# Altium PCB acqboard.PcbDoc (part 1 of 5)
Units mil, origin at the board's own origin, x right, y up, seen from the top; angles counter-clockwise.
Board outline 7000 x 5250 mil, 4 copper layers (Top Layer, Internal Plane 1, Internal Plane 2, Bottom Layer); 629 components, 384 nets, 2086 pads, 785 vias.
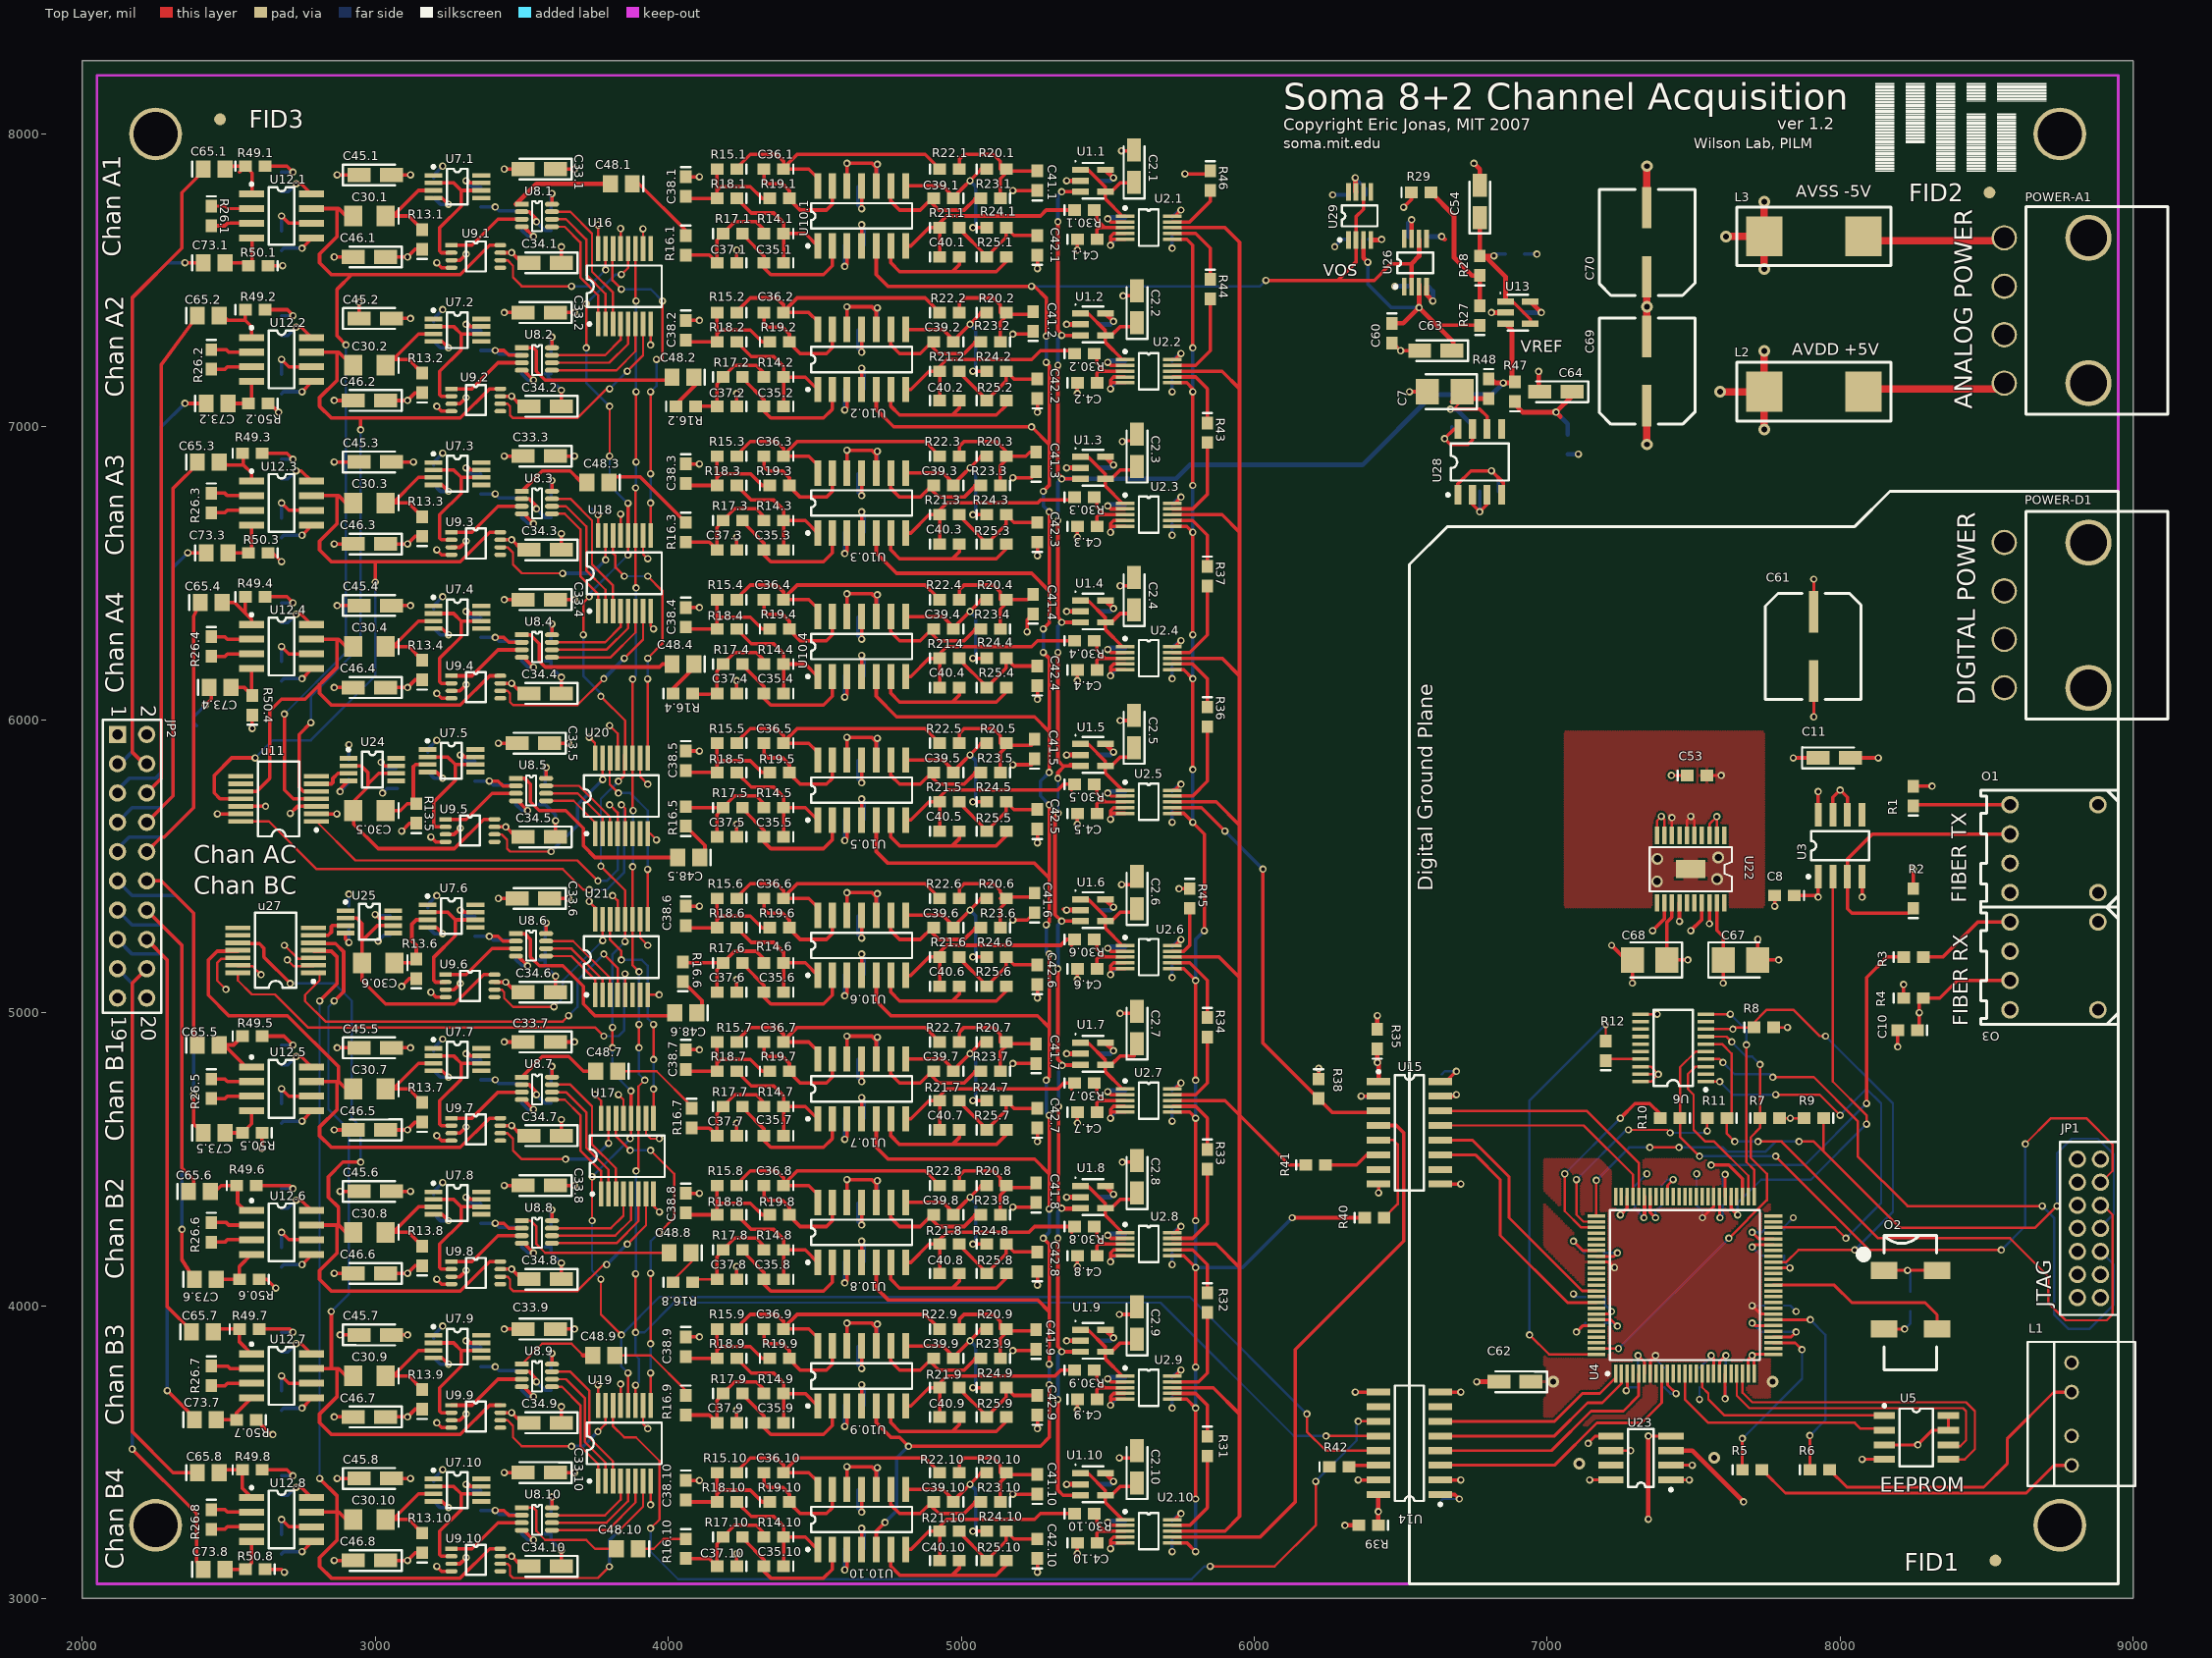
[diagram p0: Top Layer view]
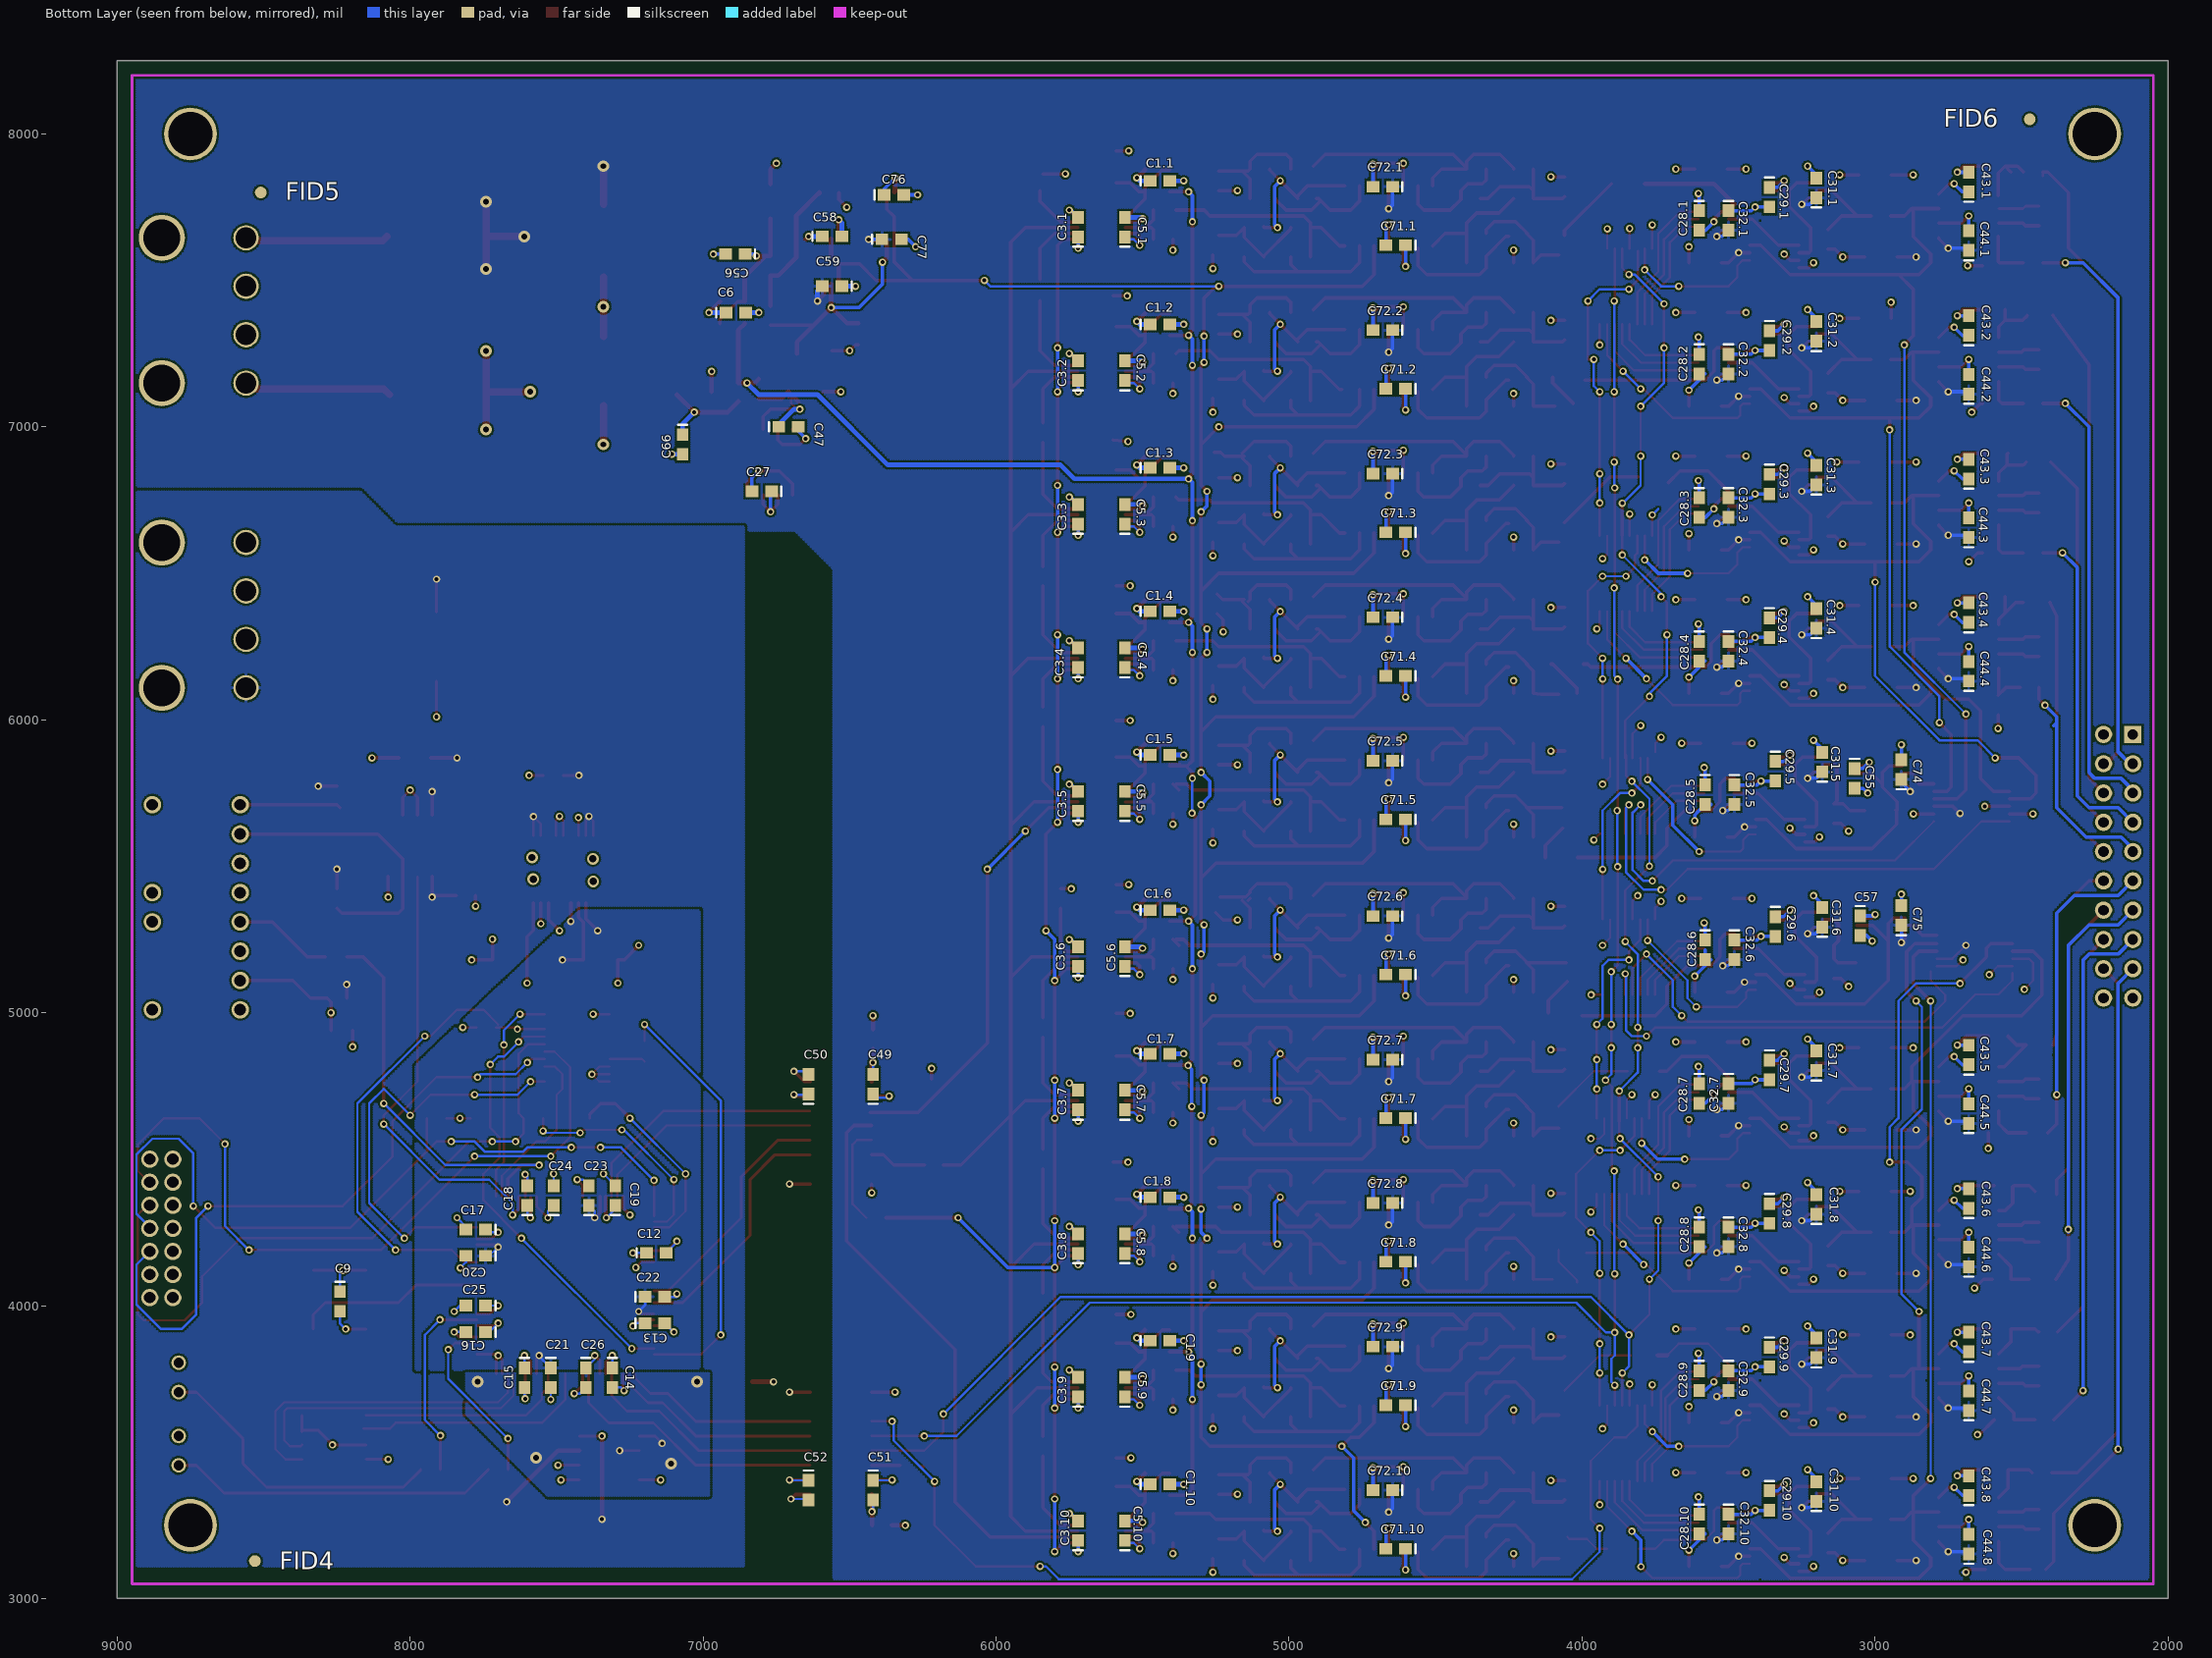
[diagram p1: Bottom Layer view, seen from below]
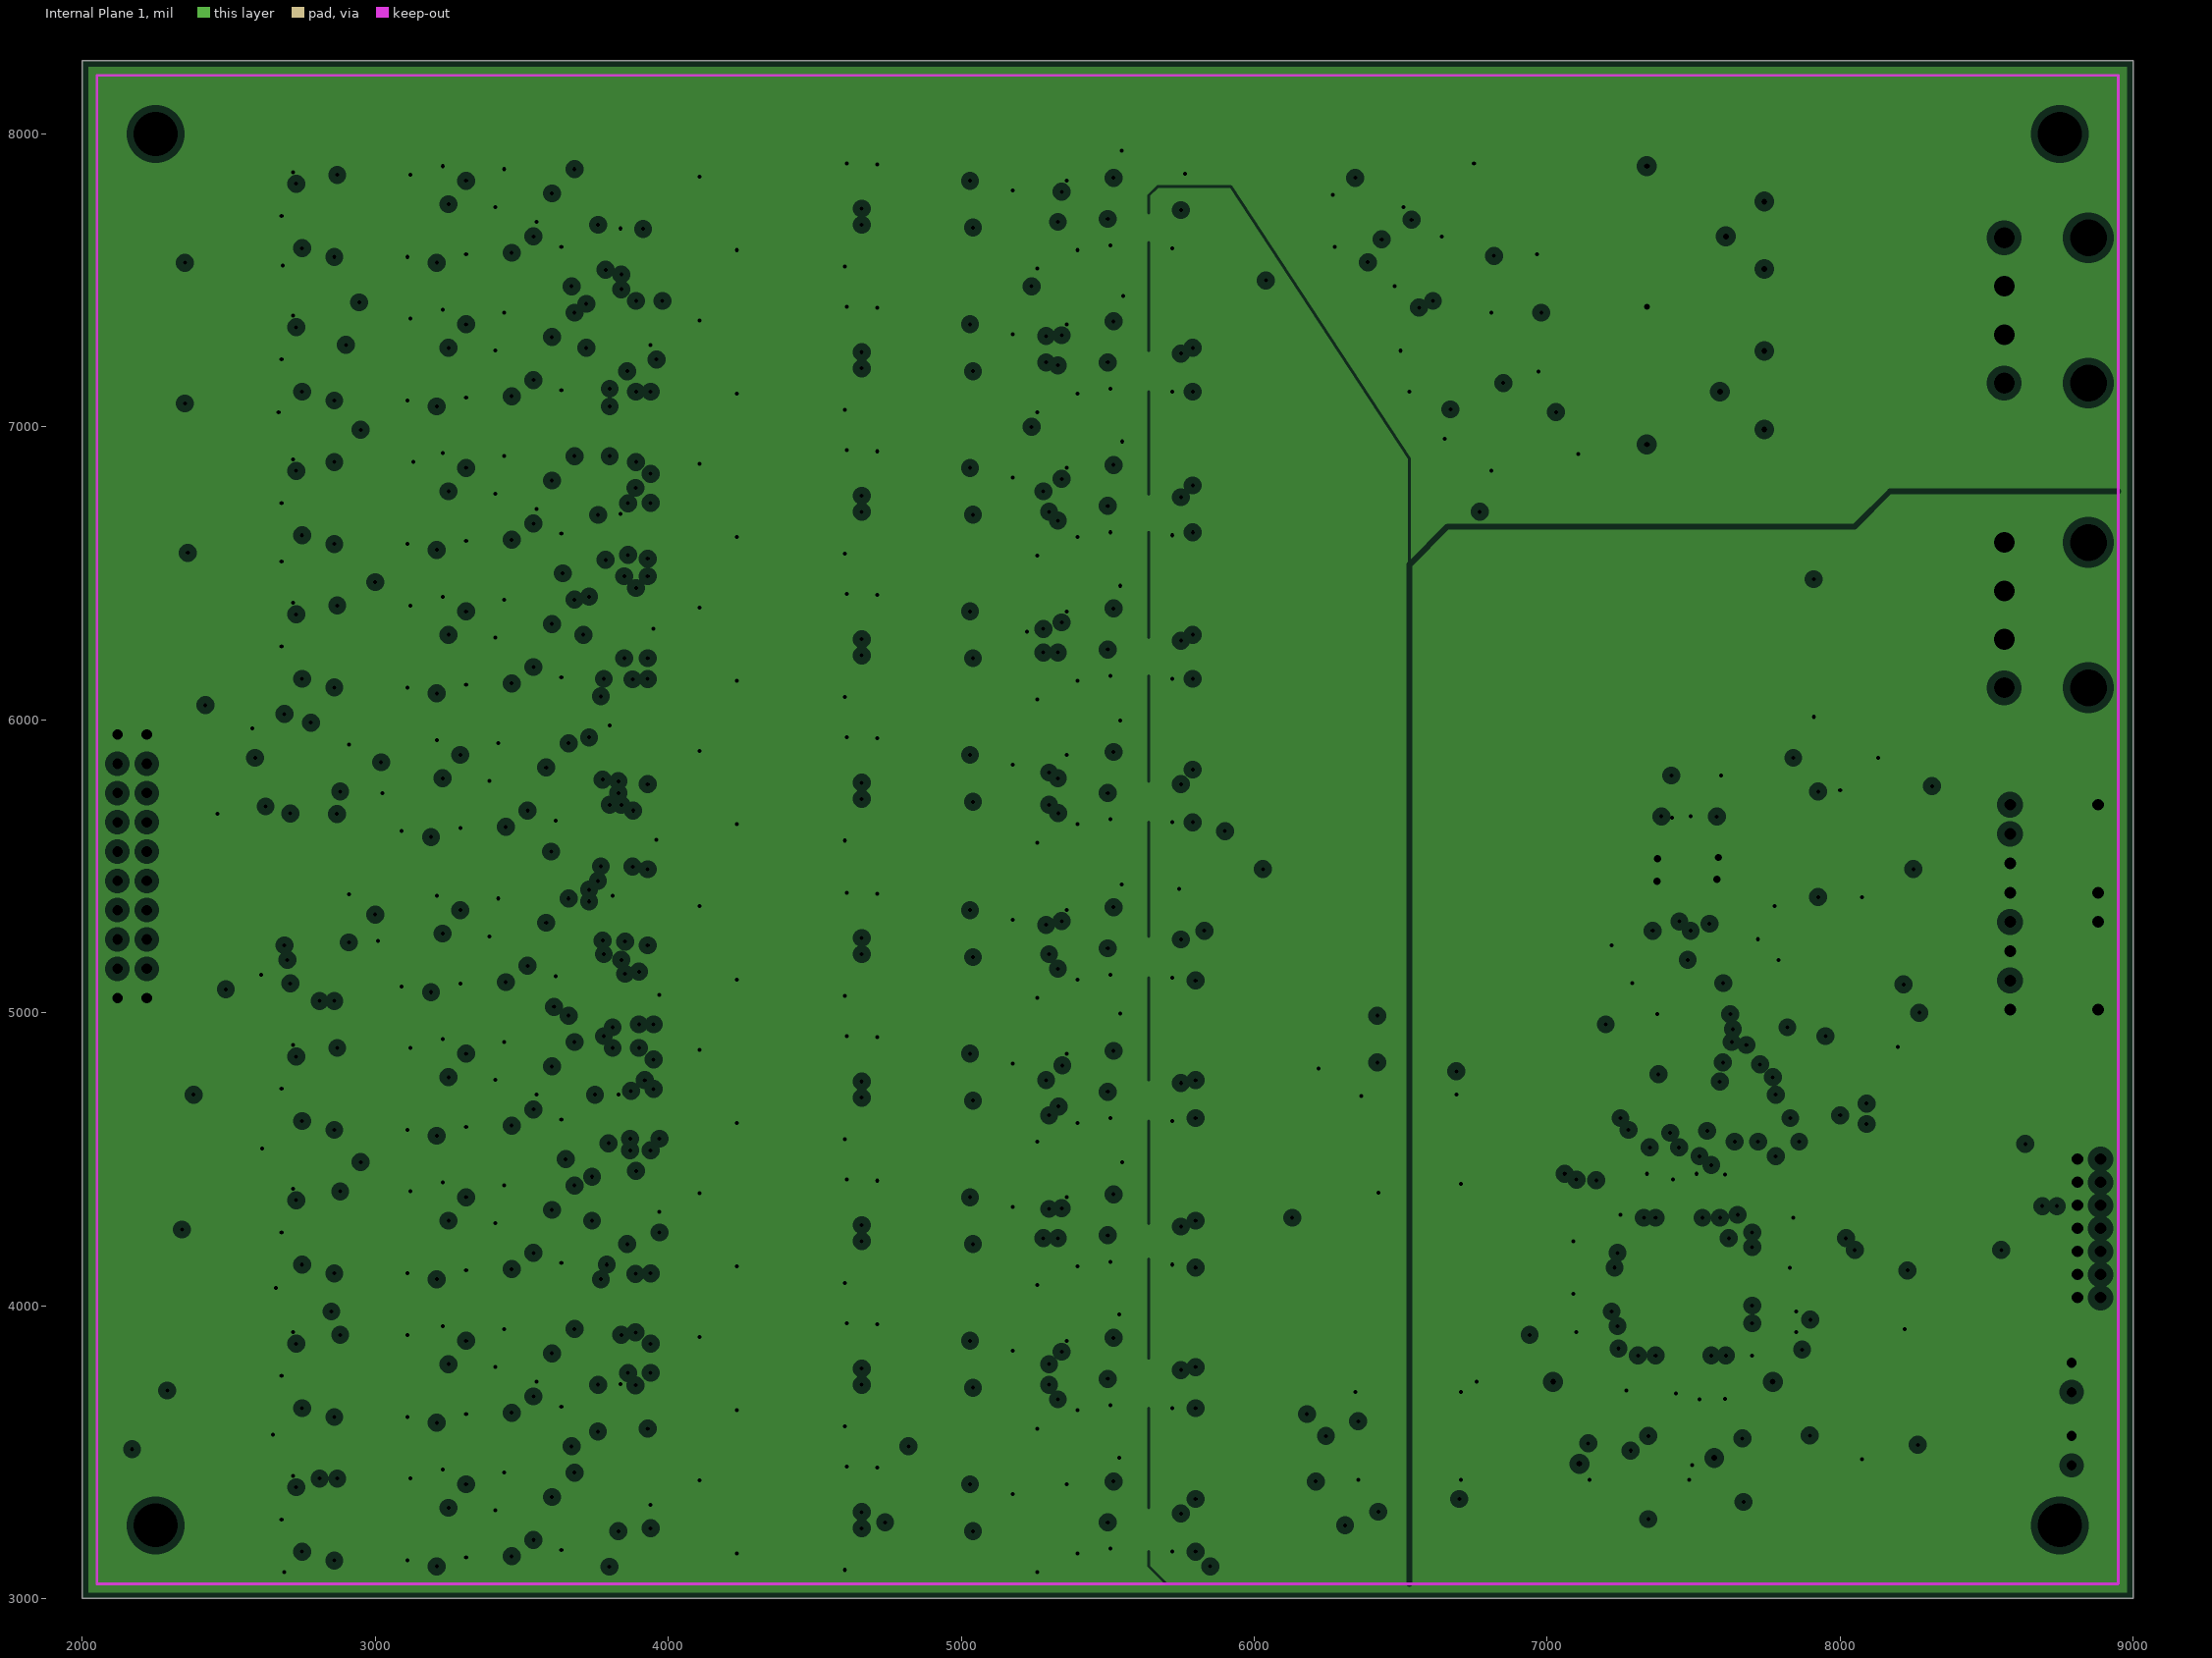
[diagram p2: Internal Plane 1, clearances drawn from the general rule]
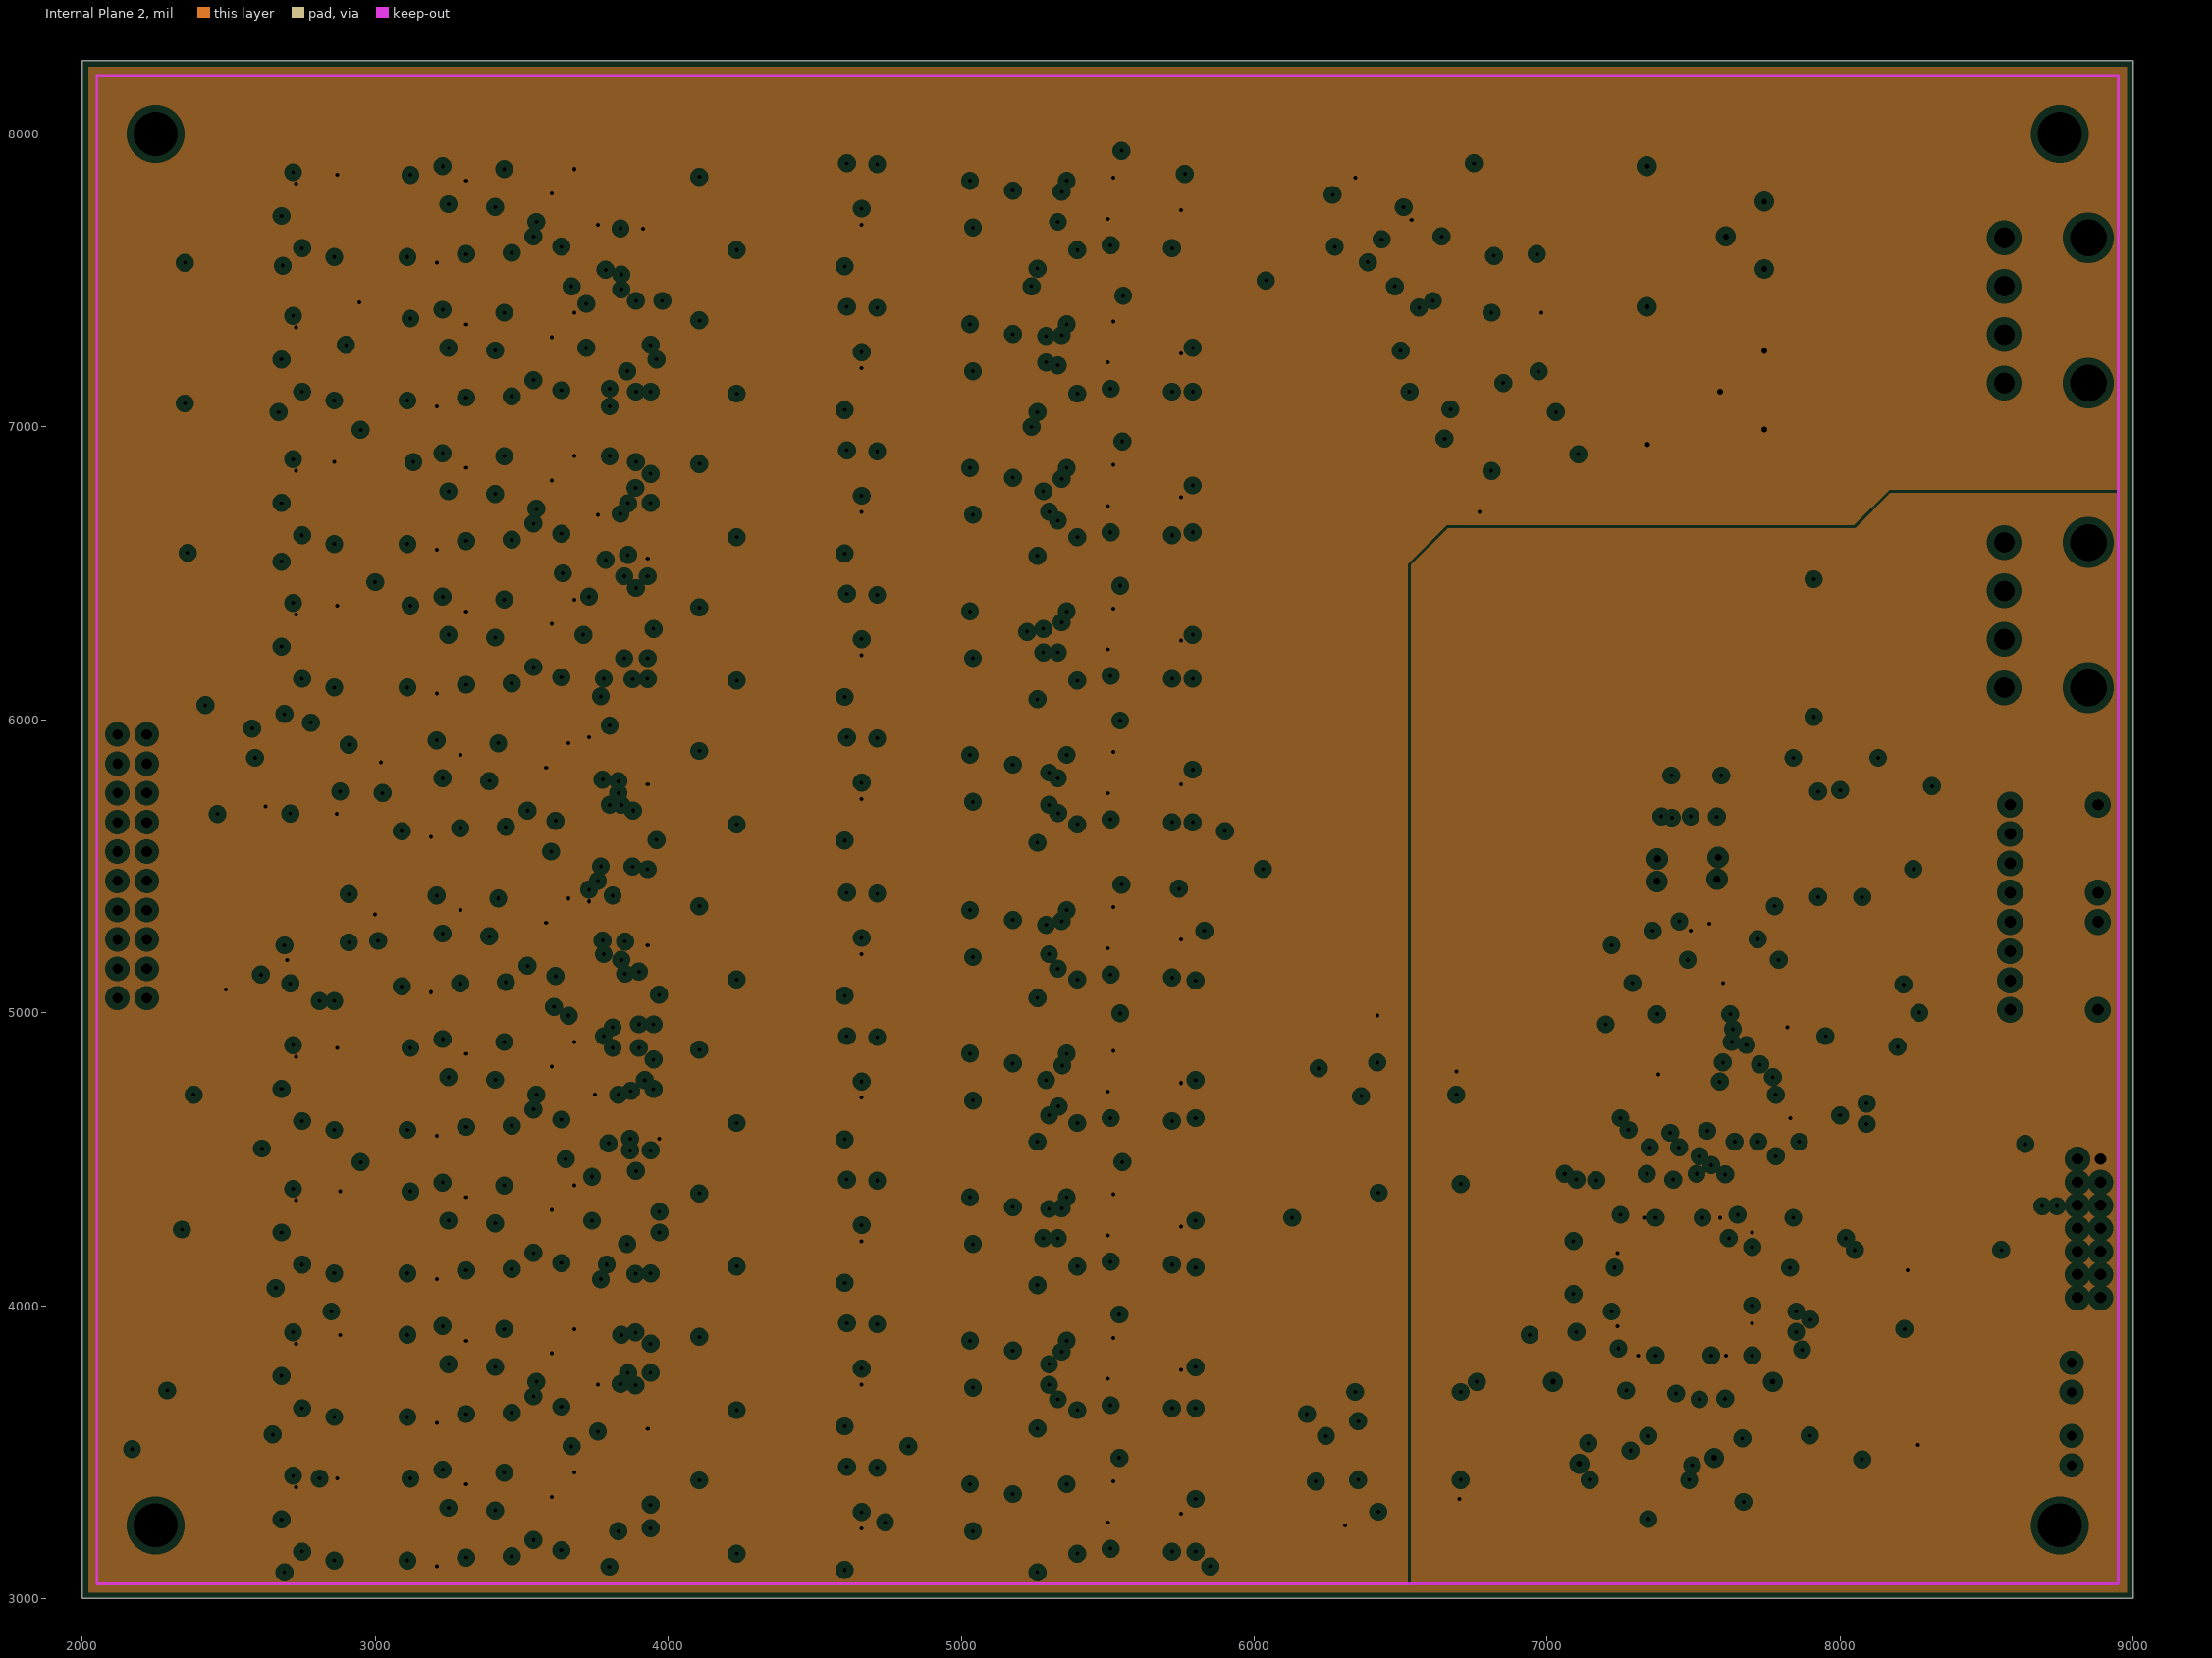
[diagram p3: Internal Plane 2, clearances drawn from the general rule]

## Layer stack, top to bottom
Top Layer: signal copper 1.4
Dielectric: core 12.6, FR-4, Dk 4.8
Internal Plane 1: plane copper 1.4, net (Multiple Nets)
Dielectric: prepreg 12.6, FR-4, Dk 4.8
Internal Plane 2: plane copper 1.4, net (Multiple Nets)
Dielectric: core 12.6, FR-4, Dk 4.8
Bottom Layer: signal copper 1.4

## Board outline
2000,3000 9000,3000 9000,8250 2000,8250

## Design rules (kind name [scope] priority, off if disabled: settings)
Clearance [All] p1: gap=7
ComponentClearance [All] p1: gap=10 collisioncheckmode=0 verticalgap=10
HoleSize [All] p1: absolutevalues=TRUE maxlimit=200 minlimit=1 maxpercent=80.000 minpercent=20.000
PlaneClearance [All] p1: clearance=24
PlaneConnect [All] p1: planeconnectstyle=Relief reliefexpansion=20 reliefentries=4 reliefconductorwidth=20 reliefairgap=10
PolygonConnect PolyConnPower [(InComponent('U22') AND InNet('GND'))] p1: connectstyle=Relief reliefconductorwidth=50 reliefentries=4 polygonreliefangle="90 Angle"
PolygonConnect [All] p2: connectstyle=Relief reliefconductorwidth=10 reliefentries=4 polygonreliefangle="90 Angle"
RoomDefinition ADC3 [InComponentClass('ADC3')] p1: confinementstyle=ConfineIn formatcopy=TRUE lockcomponents=FALSE outline 5350,6530 5840,6530 5840,6970 5350,6970
RoomDefinition ADC1 [InComponentClass('ADC1')] p2: confinementstyle=ConfineIn formatcopy=TRUE lockcomponents=FALSE outline 5350,7510 5840,7510 5840,7950 5350,7950
RoomDefinition ADC2 [InComponentClass('ADC2')] p3: confinementstyle=ConfineIn formatcopy=TRUE lockcomponents=FALSE outline 5350,7020 5840,7020 5840,7460 5350,7460
RoomDefinition ADC4 [InComponentClass('ADC4')] p4: confinementstyle=ConfineIn formatcopy=TRUE lockcomponents=FALSE outline 5350,6040 5840,6040 5840,6480 5350,6480
RoomDefinition ADC5 [InComponentClass('ADC5')] p5: confinementstyle=ConfineIn formatcopy=TRUE lockcomponents=FALSE outline 5350,5550 5840,5550 5840,5990 5350,5990
RoomDefinition ADC6 [InComponentClass('ADC6')] p6: confinementstyle=ConfineIn formatcopy=TRUE lockcomponents=FALSE outline 5350,5020 5840,5020 5840,5460 5350,5460
RoomDefinition ADC7 [InComponentClass('ADC7')] p7: confinementstyle=ConfineIn formatcopy=TRUE lockcomponents=FALSE outline 5350,4530 5840,4530 5840,4970 5350,4970
RoomDefinition ADC8 [InComponentClass('ADC8')] p8: confinementstyle=ConfineIn formatcopy=TRUE lockcomponents=FALSE outline 5350,4040 5840,4040 5840,4480 5350,4480
RoomDefinition ADC9 [InComponentClass('ADC9')] p9: confinementstyle=ConfineIn formatcopy=TRUE lockcomponents=FALSE outline 5350,3550 5840,3550 5840,3990 5350,3990
RoomDefinition ADC10 [InComponentClass('ADC10')] p10: confinementstyle=ConfineIn formatcopy=TRUE lockcomponents=FALSE outline 5350,3060 5840,3060 5840,3500 5350,3500
RoomDefinition inmux1 [InComponentClass('inmux1')] p11: confinementstyle=ConfineIn formatcopy=TRUE lockcomponents=FALSE outline 2420,4980 3000,4980 3000,5950 2420,5950
RoomDefinition AA6 [InComponentClass('AA6')] p12: confinementstyle=ConfineIn formatcopy=TRUE lockcomponents=FALSE outline 3990,5010 5340,5010 5340,5460 3990,5460
RoomDefinition PGA8 [InComponentClass('PGA8')] p13: confinementstyle=ConfineIn formatcopy=TRUE lockcomponents=FALSE outline 2860,4030 3710,4030 3710,4480 2860,4480
RoomDefinition IN8 [InComponentClass('IN8')] p14: confinementstyle=ConfineIn formatcopy=TRUE lockcomponents=FALSE outline 2380,3050 3110,3050 3110,3500 2380,3500
RoomDefinition IN6 [InComponentClass('IN6')] p15: confinementstyle=ConfineIn formatcopy=TRUE lockcomponents=FALSE outline 2380,4030 3110,4030 3110,4480 2380,4480
RoomDefinition IN7 [InComponentClass('IN7')] p16: confinementstyle=ConfineIn formatcopy=TRUE lockcomponents=FALSE outline 2380,3540 3110,3540 3110,3990 2380,3990
RoomDefinition IN5 [InComponentClass('IN5')] p17: confinementstyle=ConfineIn formatcopy=TRUE lockcomponents=FALSE outline 2380,4520 3110,4520 3110,4970 2380,4970
RoomDefinition AA4 [InComponentClass('AA4')] p18: confinementstyle=ConfineIn formatcopy=TRUE lockcomponents=FALSE outline 3990,6030 5340,6030 5340,6480 3990,6480
RoomDefinition AA3 [InComponentClass('AA3')] p19: confinementstyle=ConfineIn formatcopy=TRUE lockcomponents=FALSE outline 3990,6520 5340,6520 5340,6970 3990,6970
RoomDefinition PGA4 [InComponentClass('PGA4')] p20: confinementstyle=ConfineIn formatcopy=TRUE lockcomponents=FALSE outline 2860,6030 3710,6030 3710,6480 2860,6480
RoomDefinition IN4 [InComponentClass('IN4')] p21: confinementstyle=ConfineIn formatcopy=TRUE lockcomponents=FALSE outline 2380,6030 3110,6030 3110,6480 2380,6480
RoomDefinition PGA3 [InComponentClass('PGA3')] p22: confinementstyle=ConfineIn formatcopy=TRUE lockcomponents=FALSE outline 2860,6520 3710,6520 3710,6970 2860,6970
RoomDefinition IN3 [InComponentClass('IN3')] p23: confinementstyle=ConfineIn formatcopy=TRUE lockcomponents=FALSE outline 2380,6520 3110,6520 3110,6970 2380,6970
RoomDefinition AA2 [InComponentClass('AA2')] p24: confinementstyle=ConfineIn formatcopy=TRUE lockcomponents=FALSE outline 3990,7010 5340,7010 5340,7460 3990,7460
RoomDefinition PGA2 [InComponentClass('PGA2')] p25: confinementstyle=ConfineIn formatcopy=TRUE lockcomponents=FALSE outline 2860,7010 3710,7010 3710,7460 2860,7460
RoomDefinition IN2 [InComponentClass('IN2')] p26: confinementstyle=ConfineIn formatcopy=TRUE lockcomponents=FALSE outline 2380,7010 3110,7010 3110,7460 2380,7460
RoomDefinition AA1 [InComponentClass('AA1')] p27: confinementstyle=ConfineIn formatcopy=TRUE lockcomponents=FALSE outline 3990,7500 5340,7500 5340,7950 3990,7950
RoomDefinition AA5 [InComponentClass('AA5')] p28: confinementstyle=ConfineIn formatcopy=TRUE lockcomponents=FALSE outline 3990,5540 5340,5540 5340,5990 3990,5990
RoomDefinition AA7 [InComponentClass('AA7')] p29: confinementstyle=ConfineIn formatcopy=TRUE lockcomponents=FALSE outline 3990,4520 5340,4520 5340,4970 3990,4970
RoomDefinition AA8 [InComponentClass('AA8')] p30: confinementstyle=ConfineIn formatcopy=TRUE lockcomponents=FALSE outline 3990,4030 5340,4030 5340,4480 3990,4480
RoomDefinition AA9 [InComponentClass('AA9')] p31: confinementstyle=ConfineIn formatcopy=TRUE lockcomponents=FALSE outline 3990,3540 5340,3540 5340,3990 3990,3990
RoomDefinition AA10 [InComponentClass('AA10')] p32: confinementstyle=ConfineIn formatcopy=TRUE lockcomponents=FALSE outline 3990,3050 5340,3050 5340,3500 3990,3500
RoomDefinition "FPGA Power" [InComponentClass('FPGA Power')] p33: confinementstyle=ConfineIn formatcopy=TRUE lockcomponents=FALSE outline 9000,3850 6880,3850 6880,4570 9000,4570
RoomDefinition FPGA [InComponentClass('FPGA')] p34: confinementstyle=ConfineIn formatcopy=TRUE lockcomponents=FALSE outline 9000,3110 6880,3110 6880,3910 9000,3910
RoomDefinition IN1 [InComponentClass('IN1')] p35: confinementstyle=ConfineIn formatcopy=TRUE lockcomponents=FALSE outline 2380,7500 3110,7500 3110,7950 2380,7950
RoomDefinition PGA1 [InComponentClass('PGA1')] p36: confinementstyle=ConfineIn formatcopy=TRUE lockcomponents=FALSE outline 2860,7500 3710,7500 3710,7950 2860,7950
RoomDefinition PGA5 [InComponentClass('PGA5')] p37: confinementstyle=ConfineIn formatcopy=TRUE lockcomponents=FALSE outline 2840,5540 3690,5540 3690,5990 2840,5990
RoomDefinition PGA6 [InComponentClass('PGA6')] p38: confinementstyle=ConfineIn formatcopy=TRUE lockcomponents=FALSE outline 2840,5010 3690,5010 3690,5460 2840,5460
RoomDefinition PGA7 [InComponentClass('PGA7')] p39: confinementstyle=ConfineIn formatcopy=TRUE lockcomponents=FALSE outline 2860,4520 3710,4520 3710,4970 2860,4970
RoomDefinition PGA9 [InComponentClass('PGA9')] p40: confinementstyle=ConfineIn formatcopy=TRUE lockcomponents=FALSE outline 2860,3540 3710,3540 3710,3990 2860,3990
RoomDefinition PGA10 [InComponentClass('PGA10')] p41: confinementstyle=ConfineIn formatcopy=TRUE lockcomponents=FALSE outline 2860,3050 3710,3050 3710,3500 2860,3500
RoomDefinition isolation [InComponentClass('isolation')] p42: confinementstyle=ConfineIn formatcopy=TRUE lockcomponents=FALSE outline 9000,4520 6860,4520 6860,5060 9000,5060
RoomDefinition main [InComponentClass('main')] p43: confinementstyle=ConfineIn formatcopy=TRUE lockcomponents=FALSE outline 9000,5010 8620,5010 8620,6290 9000,6290
RoomDefinition muxes [InComponentClass('muxes')] p44: confinementstyle=ConfineIn formatcopy=TRUE lockcomponents=FALSE outline 9000,6230 7290,6230 7290,6700 9000,6700
RoomDefinition power [InComponentClass('power')] p45: confinementstyle=ConfineIn formatcopy=TRUE lockcomponents=FALSE outline 6530,5760 8950,5760 8950,7950 6530,7950
RoutingVias [All] p1: holewidth=13.5 width=25 viastyle="Through Hole" minholewidth=13.5 minwidth=25 maxholewidth=28 maxwidth=50
SolderMaskExpansion [All] p1: expansion=4
TestPointUsage [All] p1: valid=0 allowmultiple=FALSE
Testpoint [All] p1: side=15 testpointundercomponent=TRUE minsize=40 maxsize=100 preferedsize=60 minholesize=0 maxholesize=40 preferedholesize=32 testpointgrid=1 style=1023 order=0123456789
Width [All] p1: maxlimit=100 minlimit=7 preferedwidth=7 toplayer_prefwidth=16 bottomlayer_prefwidth=12 minimp=50.000000 maximp=50.000000 favimp=50.000000
14 further rules are at their usual default settings.

## Classes and differential pairs
net class H[0..9]: H0 H1 H2 H3 H4 H5 H6 H7 H8 H9
net class GC[0..10]: GC1 GC2 GC3 GC4 GC5 GC6 GC7 GC8 GC9 GC10
net class GB[0..10]: GB1 GB2 GB3 GB4 GB5 GB6 GB7 GB8 GB9 GB10
net class GA[0..10]: GA1 GA2 GA3 GA4 GA5 GA6 GA7 GA8 GA9 GA10
component class inmux1: C55 C57 C74 C75 u11 U24 U25 u27
component class AA1: C35.1 C36.1 C37.1 C38.1 C39.1 C40.1 C41.1 C42.1 C71.1 C72.1 R14.1 R15.1 R16.1 R17.1 R18.1 R19.1 R20.1 R21.1 R22.1 R23.1 R24.1 R25.1 U10.1
component class AA2: C35.2 C36.2 C37.2 C38.2 C39.2 C40.2 C41.2 C42.2 C71.2 C72.2 R14.2 R15.2 R16.2 R17.2 R18.2 R19.2 R20.2 R21.2 R22.2 R23.2 R24.2 R25.2 U10.2
component class AA3: C35.3 C36.3 C37.3 C38.3 C39.3 C40.3 C41.3 C42.3 C71.3 C72.3 R14.3 R15.3 R16.3 R17.3 R18.3 R19.3 R20.3 R21.3 R22.3 R23.3 R24.3 R25.3 U10.3
component class AA4: C35.4 C36.4 C37.4 C38.4 C39.4 C40.4 C41.4 C42.4 C71.4 C72.4 R14.4 R15.4 R16.4 R17.4 R18.4 R19.4 R20.4 R21.4 R22.4 R23.4 R24.4 R25.4 U10.4
component class AA5: C35.5 C36.5 C37.5 C38.5 C39.5 C40.5 C41.5 C42.5 C71.5 C72.5 R14.5 R15.5 R16.5 R17.5 R18.5 R19.5 R20.5 R21.5 R22.5 R23.5 R24.5 R25.5 U10.5
component class AA6: C35.6 C36.6 C37.6 C38.6 C39.6 C40.6 C41.6 C42.6 C71.6 C72.6 R14.6 R15.6 R16.6 R17.6 R18.6 R19.6 R20.6 R21.6 R22.6 R23.6 R24.6 R25.6 U10.6
component class AA7: C35.7 C36.7 C37.7 C38.7 C39.7 C40.7 C41.7 C42.7 C71.7 C72.7 R14.7 R15.7 R16.7 R17.7 R18.7 R19.7 R20.7 R21.7 R22.7 R23.7 R24.7 R25.7 U10.7
component class AA8: C35.8 C36.8 C37.8 C38.8 C39.8 C40.8 C41.8 C42.8 C71.8 C72.8 R14.8 R15.8 R16.8 R17.8 R18.8 R19.8 R20.8 R21.8 R22.8 R23.8 R24.8 R25.8 U10.8
component class AA9: C35.9 C36.9 C37.9 C38.9 C39.9 C40.9 C41.9 C42.9 C71.9 C72.9 R14.9 R15.9 R16.9 R17.9 R18.9 R19.9 R20.9 R21.9 R22.9 R23.9 R24.9 R25.9 U10.9
component class AA10: C35.10 C36.10 C37.10 C38.10 C39.10 C40.10 C41.10 C42.10 C71.10 C72.10 R14.10 R15.10 R16.10 R17.10 R18.10 R19.10 R20.10 R21.10 R22.10 R23.10 R24.10 R25.10 U10.10
component class "FPGA Power": C12 C13 C14 C15 C16 C17 C18 C19 C20 C21 C22 C23 C24 C25 C26 JP1 R7 R8 R9 R10 R11 R12 U6
component class FPGA: C8 C9 C10 C11 L1 O1 O2 O3 R1 R2 R3 R4 R5 R6 U3 U4 U5
component class IN1: C43.1 C44.1 C45.1 C46.1 C65.1 C73.1 R26.1 R49.1 R50.1 U12.1
component class IN2: C43.2 C44.2 C45.2 C46.2 C65.2 C73.2 R26.2 R49.2 R50.2 U12.2
component class IN3: C43.3 C44.3 C45.3 C46.3 C65.3 C73.3 R26.3 R49.3 R50.3 U12.3
component class IN4: C43.4 C44.4 C45.4 C46.4 C65.4 C73.4 R26.4 R49.4 R50.4 U12.4
component class IN5: C43.5 C44.5 C45.5 C46.5 C65.5 C73.5 R26.5 R49.5 R50.5 U12.5
component class IN6: C43.6 C44.6 C45.6 C46.6 C65.6 C73.6 R26.6 R49.6 R50.6 U12.6
component class IN7: C43.7 C44.7 C45.7 C46.7 C65.7 C73.7 R26.7 R49.7 R50.7 U12.7
component class IN8: C43.8 C44.8 C45.8 C46.8 C65.8 C73.8 R26.8 R49.8 R50.8 U12.8
component class PGA1: C28.1 C29.1 C30.1 C31.1 C32.1 C33.1 C34.1 C48.1 R13.1 U7.1 U8.1 U9.1
component class PGA2: C28.2 C29.2 C30.2 C31.2 C32.2 C33.2 C34.2 C48.2 R13.2 U7.2 U8.2 U9.2
component class PGA3: C28.3 C29.3 C30.3 C31.3 C32.3 C33.3 C34.3 C48.3 R13.3 U7.3 U8.3 U9.3
component class PGA4: C28.4 C29.4 C30.4 C31.4 C32.4 C33.4 C34.4 C48.4 R13.4 U7.4 U8.4 U9.4
component class PGA5: C28.5 C29.5 C30.5 C31.5 C32.5 C33.5 C34.5 C48.5 R13.5 U7.5 U8.5 U9.5
component class PGA6: C28.6 C29.6 C30.6 C31.6 C32.6 C33.6 C34.6 C48.6 R13.6 U7.6 U8.6 U9.6
component class PGA7: C28.7 C29.7 C30.7 C31.7 C32.7 C33.7 C34.7 C48.7 R13.7 U7.7 U8.7 U9.7
component class PGA8: C28.8 C29.8 C30.8 C31.8 C32.8 C33.8 C34.8 C48.8 R13.8 U7.8 U8.8 U9.8
component class PGA9: C28.9 C29.9 C30.9 C31.9 C32.9 C33.9 C34.9 C48.9 R13.9 U7.9 U8.9 U9.9
component class PGA10: C28.10 C29.10 C30.10 C31.10 C32.10 C33.10 C34.10 C48.10 R13.10 U7.10 U8.10 U9.10
component class isolation: C48 C49 C50 C51 C52 R35 R38 R39 R40 R41 R42 U14 U15
component class muxes: U16 U17 U18 U19 U20 U21
component class power: C6 C7 C27 C47 C53 C54 C56 C58 C59 C60 C61 C62 C63 C64 C66 C67 C68 C69 C70 C76 C77 L2 L3 POWER-A1 POWER-D1 R27 R28 R29 R47 R48 U13 U22 U23 U26 U28 U29
net class AAIN[1..10]: AAIN1 AAIN2 AAIN3 AAIN4 AAIN5 AAIN6 AAIN7 AAIN8 AAIN9 AAIN10
net class AAOUT[1..10]: AAOUT1 AAOUT2 AAOUT3 AAOUT4 AAOUT5 AAOUT6 AAOUT7 AAOUT8 AAOUT9 AAOUT10
net class IN+[1..8]: IN+1 IN+2 IN+3 IN+4 IN+5 IN+6 IN+7 IN+8
net class IN-[1..8]: IN-1 IN-2 IN-3 IN-4 IN-5 IN-6 IN-7 IN-8
net class INAOUT[1..8]: INAOUT1 INAOUT2 INAOUT3 INAOUT4 INAOUT5 INAOUT6 INAOUT7 INAOUT8
net class PGAIN[1..10]: PGAIN5 PGAIN6
channel class PGA: PGA1 PGA2 PGA3 PGA4 PGA5 PGA6 PGA7 PGA8 PGA9 PGA10
channel class aafilter: AA1 AA2 AA3 AA4 AA5 AA6 AA7 AA8 AA9 AA10
channel class input: IN1 IN2 IN3 IN4 IN5 IN6 IN7 IN8
component class ADC1: C1.1 C2.1 C3.1 C4.1 C5.1 R30.1 U1.1 U2.1
component class ADC2: C1.2 C2.2 C3.2 C4.2 C5.2 R30.2 U1.2 U2.2
component class ADC3: C1.3 C2.3 C3.3 C4.3 C5.3 R30.3 U1.3 U2.3
component class ADC4: C1.4 C2.4 C3.4 C4.4 C5.4 R30.4 U1.4 U2.4
component class ADC5: C1.5 C2.5 C3.5 C4.5 C5.5 R30.5 U1.5 U2.5
component class ADC6: C1.6 C2.6 C3.6 C4.6 C5.6 R30.6 U1.6 U2.6
component class ADC7: C1.7 C2.7 C3.7 C4.7 C5.7 R30.7 U1.7 U2.7
component class ADC8: C1.8 C2.8 C3.8 C4.8 C5.8 R30.8 U1.8 U2.8
component class ADC9: C1.9 C2.9 C3.9 C4.9 C5.9 R30.9 U1.9 U2.9
component class ADC10: C1.10 C2.10 C3.10 C4.10 C5.10 R30.10 U1.10 U2.10
component class main: FID1 FID2 FID3 FID4 FID5 FID6 JP2 R31 R32 R33 R34 R36 R37 R43 R44 R45 R46
net class SDI[1..10]: SDI1 SDI2 SDI3 SDI4 SDI5 SDI6 SDI7 SDI8 SDI9 SDI10
channel class ADC: ADC1 ADC2 ADC3 ADC4 ADC5 ADC6 ADC7 ADC8 ADC9 ADC10
net class SDA[1..10]: SDA1 SDA2 SDA3 SDA4 SDA5 SDA6 SDA7 SDA8 SDA9 SDA10

## Components (designator, comment, footprint, x,y, rotation, side; value= is the part's Value field where it differs from the comment)
C1.1 "CAPACITOR" 0603 5440,7840 r180 bottom (schematic designator C1)
C1.2 "CAPACITOR" 0603 5440,7350 r180 bottom (schematic designator C1)
C1.3 "CAPACITOR" 0603 5440,6860 r180 bottom (schematic designator C1)
C1.4 "CAPACITOR" 0603 5440,6370 r180 bottom (schematic designator C1)
C1.5 "CAPACITOR" 0603 5440,5880 r180 bottom (schematic designator C1)
C1.6 "CAPACITOR" 0603 5440,5350 r180 bottom (schematic designator C1)
C1.7 "CAPACITOR" 0603 5440,4860 r180 bottom (schematic designator C1)
C1.8 "CAPACITOR" 0603 5440,4370 r180 bottom (schematic designator C1)
C1.9 "CAPACITOR" 0603 5440,3880 r180 bottom (schematic designator C1)
C1.10 "CAPACITOR" 0603 5440,3390 r180 bottom (schematic designator C1)
C2.1 "Tantalum" 3216 5590,7890 r90 top (schematic designator C2)
C2.2 "Tantalum" 3216 5600,7410 r90 top (schematic designator C2)
C2.3 "Tantalum" 3216 5600,6920 r90 top (schematic designator C2)
C2.4 "Tantalum" 3216 5590,6430 r90 top (schematic designator C2)
C2.5 "Tantalum" 3216 5590,5960 r90 top (schematic designator C2)
C2.6 "Tantalum" 3216 5600,5410 r90 top (schematic designator C2)
C2.7 "Tantalum" 3216 5600,4950 r90 top (schematic designator C2)
C2.8 "Tantalum" 3216 5600,4440 r90 top (schematic designator C2)
C2.9 "Tantalum" 3216 5600,3940 r90 top (schematic designator C2)
C2.10 "Tantalum" 3216 5600,3450 r90 top (schematic designator C2)
C3.1 "CAPACITOR" 0603 5720,7681.75 r90 bottom (schematic designator C3)
C3.2 "CAPACITOR" 0603 5720,7191.75 r90 bottom (schematic designator C3)
C3.3 "CAPACITOR" 0603 5720,6701.75 r90 bottom (schematic designator C3)
C3.4 "CAPACITOR" 0603 5720,6211.75 r90 bottom (schematic designator C3)
C3.5 "CAPACITOR" 0603 5720,5721.75 r90 bottom (schematic designator C3)
C3.6 "CAPACITOR" 0603 5720,5191.75 r90 bottom (schematic designator C3)
C3.7 "CAPACITOR" 0603 5720,4701.75 r90 bottom (schematic designator C3)
C3.8 "CAPACITOR" 0603 5720,4211.75 r90 bottom (schematic designator C3)
C3.9 "CAPACITOR" 0603 5720,3721.75 r90 bottom (schematic designator C3)
C3.10 "CAPACITOR" 0603 5720,3231.75 r90 bottom (schematic designator C3)
C4.1 "CAPACITOR" 0603 5430,7640 r0 top (schematic designator C4)
C4.2 "CAPACITOR" 0603 5430,7150 r0 top (schematic designator C4)
C4.3 "CAPACITOR" 0603 5430,6660 r0 top (schematic designator C4)
C4.4 "CAPACITOR" 0603 5430,6170 r0 top (schematic designator C4)
C4.5 "CAPACITOR" 0603 5430,5680 r0 top (schematic designator C4)
C4.6 "CAPACITOR" 0603 5430,5150 r0 top (schematic designator C4)
C4.7 "CAPACITOR" 0603 5430,4660 r0 top (schematic designator C4)
C4.8 "CAPACITOR" 0603 5430,4170 r0 top (schematic designator C4)
C4.9 "CAPACITOR" 0603 5430,3680 r0 top (schematic designator C4)
C4.10 "CAPACITOR" 0603 5430,3190 r0 top (schematic designator C4)
C5.1 "CAPACITOR" 0603 5560,7681.75 r90 bottom (schematic designator C5)
C5.2 "CAPACITOR" 0603 5560,7191.75 r90 bottom (schematic designator C5)
C5.3 "CAPACITOR" 0603 5560,6701.75 r90 bottom (schematic designator C5)
C5.4 "CAPACITOR" 0603 5560,6211.75 r90 bottom (schematic designator C5)
C5.5 "CAPACITOR" 0603 5560,5721.75 r90 bottom (schematic designator C5)
C5.6 "CAPACITOR" 0603 5560,5191.75 r90 bottom (schematic designator C5)
C5.7 "CAPACITOR" 0603 5560,4701.75 r90 bottom (schematic designator C5)
C5.8 "CAPACITOR" 0603 5560,4211.75 r90 bottom (schematic designator C5)
C5.9 "CAPACITOR" 0603 5560,3721.75 r90 bottom (schematic designator C5)
C5.10 "CAPACITOR" 0603 5560,3231.75 r90 bottom (schematic designator C5)
C6 "CAPACITOR" 0603 6888.25,7390 r180 bottom
C7 "POLCAP" 3528 6650,7120 r180 top
C8 "CAPACITOR" 0603 7810,5400 r180 top
C9 "CAPACITOR" 0603 8240,4014.31 r270 bottom
C10 "CAPACITOR" 0603 8230,4940 r180 top
C11 "Tantalum" 3216 7980,5870 r0 top
C12 "CAPACITOR" 0603 7160,4180 r180 bottom
C13 "CAPACITOR" 0603 7164.31,3940 r180 bottom
C14 "CAPACITOR" 0603 7310,3754.32 r270 bottom
C15 "CAPACITOR" 0603 7610,3754.31 r270 bottom
C16 "CAPACITOR" 0603 7775.69,3910 r0 bottom
C17 "CAPACITOR" 0603 7775.69,4260 r0 bottom
C18 "CAPACITOR" 0603 7600,4375.69 r90 bottom
C19 "CAPACITOR" 0603 7300,4375.69 r90 bottom
C20 "CAPACITOR" 0603 7775.69,4170 r0 bottom
C21 "CAPACITOR" 0603 7520,3754.31 r270 bottom
C22 "CAPACITOR" 0603 7164.31,4030 r180 bottom
C23 "CAPACITOR" 0603 7390,4375.69 r90 bottom
C24 "CAPACITOR" 0603 7510,4375.69 r90 bottom
C25 "CAPACITOR" 0603 7775.69,4000 r0 bottom
C26 "CAPACITOR" 0603 7400,3754.31 r270 bottom
C27 "CAPACITOR" 0603 6800,6780 r0 bottom
C28.1 "CAPACITOR" 0603 3600,7704.31 r270 bottom (schematic designator C28)
C28.2 "CAPACITOR" 0603 3600,7214.31 r270 bottom (schematic designator C28)
C28.3 "CAPACITOR" 0603 3600,6724.31 r270 bottom (schematic designator C28)
C28.4 "CAPACITOR" 0603 3600,6234.31 r270 bottom (schematic designator C28)
C28.5 "CAPACITOR" 0603 3580,5744.31 r270 bottom (schematic designator C28)
C28.6 "CAPACITOR" 0603 3580,5214.31 r270 bottom (schematic designator C28)
C28.7 "CAPACITOR" 0603 3600,4724.31 r270 bottom (schematic designator C28)
C28.8 "CAPACITOR" 0603 3600,4234.31 r270 bottom (schematic designator C28)
C28.9 "CAPACITOR" 0603 3600,3744.31 r270 bottom (schematic designator C28)
C28.10 "CAPACITOR" 0603 3600,3254.31 r270 bottom (schematic designator C28)
C29.1 "CAPACITOR" 0603 3360,7784.31 r270 bottom (schematic designator C29)
C29.2 "CAPACITOR" 0603 3360,7294.31 r270 bottom (schematic designator C29)
C29.3 "CAPACITOR" 0603 3360,6804.31 r270 bottom (schematic designator C29)
C29.4 "CAPACITOR" 0603 3360,6314.31 r270 bottom (schematic designator C29)
C29.5 "CAPACITOR" 0603 3340,5824.31 r270 bottom (schematic designator C29)
C29.6 "CAPACITOR" 0603 3340,5294.31 r270 bottom (schematic designator C29)
C29.7 "CAPACITOR" 0603 3360,4804.31 r270 bottom (schematic designator C29)
C29.8 "CAPACITOR" 0603 3360,4314.31 r270 bottom (schematic designator C29)
C29.9 "CAPACITOR" 0603 3360,3824.31 r270 bottom (schematic designator C29)
C29.10 "CAPACITOR" 0603 3360,3334.31 r270 bottom (schematic designator C29)
C30.1 "CAPACITOR" 1206 2980,7720 r180 top (schematic designator C30)
C30.2 "CAPACITOR" 1206 2980,7210 r180 top (schematic designator C30)
C30.3 "CAPACITOR" 1206 2980,6740 r180 top (schematic designator C30)
C30.4 "CAPACITOR" 1206 2980,6250 r180 top (schematic designator C30)
C30.5 "CAPACITOR" 1206 2980,5690 r180 top (schematic designator C30)
C30.6 "CAPACITOR" 1206 3010,5170 r180 top (schematic designator C30)
C30.7 "CAPACITOR" 1206 2980,4740 r180 top (schematic designator C30)
C30.8 "CAPACITOR" 1206 2980,4250 r180 top (schematic designator C30)
C30.9 "CAPACITOR" 1206 2980,3760 r180 top (schematic designator C30)
C30.10 "CAPACITOR" 1206 2980,3270 r180 top (schematic designator C30)
C31.1 "CAPACITOR" 0603 3200,7815.69 r90 bottom (schematic designator C31)
C31.2 "CAPACITOR" 0603 3200,7325.69 r90 bottom (schematic designator C31)
C31.3 "CAPACITOR" 0603 3200,6835.69 r90 bottom (schematic designator C31)
C31.4 "CAPACITOR" 0603 3200,6345.69 r90 bottom (schematic designator C31)
C31.5 "CAPACITOR" 0603 3180,5855.69 r90 bottom (schematic designator C31)
C31.6 "CAPACITOR" 0603 3180,5325.69 r90 bottom (schematic designator C31)
C31.7 "CAPACITOR" 0603 3200,4835.69 r90 bottom (schematic designator C31)
C31.8 "CAPACITOR" 0603 3200,4345.69 r90 bottom (schematic designator C31)
C31.9 "CAPACITOR" 0603 3200,3855.69 r90 bottom (schematic designator C31)
C31.10 "CAPACITOR" 0603 3200,3365.69 r90 bottom (schematic designator C31)
C32.1 "CAPACITOR" 0603 3500,7704.31 r270 bottom (schematic designator C32)
C32.2 "CAPACITOR" 0603 3500,7214.31 r270 bottom (schematic designator C32)
C32.3 "CAPACITOR" 0603 3500,6724.31 r270 bottom (schematic designator C32)
C32.4 "CAPACITOR" 0603 3500,6234.31 r270 bottom (schematic designator C32)
C32.5 "CAPACITOR" 0603 3480,5744.31 r270 bottom (schematic designator C32)
C32.6 "CAPACITOR" 0603 3480,5214.31 r270 bottom (schematic designator C32)
C32.7 "CAPACITOR" 0603 3500,4724.31 r270 bottom (schematic designator C32)
C32.8 "CAPACITOR" 0603 3500,4234.31 r270 bottom (schematic designator C32)
C32.9 "CAPACITOR" 0603 3500,3744.31 r270 bottom (schematic designator C32)
C32.10 "CAPACITOR" 0603 3500,3254.31 r270 bottom (schematic designator C32)
C33.1 "Tantalum" 3216 3560,7880 r180 top (schematic designator C33)
C33.2 "Tantalum" 3216 3560,7390 r180 top (schematic designator C33)
C33.3 "Tantalum" 3216 3560,6900 r180 top (schematic designator C33)
C33.4 "Tantalum" 3216 3560,6410 r180 top (schematic designator C33)
C33.5 "Tantalum" 3216 3540,5920 r180 top (schematic designator C33)
C33.6 "Tantalum" 3216 3540,5390 r180 top (schematic designator C33)
C33.7 "Tantalum" 3216 3560,4900 r180 top (schematic designator C33)
C33.8 "Tantalum" 3216 3560,4410 r180 top (schematic designator C33)
C33.9 "Tantalum" 3216 3560,3920 r180 top (schematic designator C33)
C33.10 "Tantalum" 3216 3560,3430 r180 top (schematic designator C33)
C34.1 "Tantalum" 3216 3580,7560 r180 top (schematic designator C34)
C34.2 "Tantalum" 3216 3580,7070 r180 top (schematic designator C34)
C34.3 "Tantalum" 3216 3580,6580 r180 top (schematic designator C34)
C34.4 "Tantalum" 3216 3580,6090 r180 top (schematic designator C34)
C34.5 "Tantalum" 3216 3560,5600 r180 top (schematic designator C34)
C34.6 "Tantalum" 3216 3560,5070 r180 top (schematic designator C34)
C34.7 "Tantalum" 3216 3580,4580 r180 top (schematic designator C34)
C34.8 "Tantalum" 3216 3580,4090 r180 top (schematic designator C34)
C34.9 "Tantalum" 3216 3580,3600 r180 top (schematic designator C34)
C34.10 "Tantalum" 3216 3580,3110 r180 top (schematic designator C34)
C35.1 "CAPACITOR" 0603 4360,7560 r180 top (schematic designator C35)
C35.2 "CAPACITOR" 0603 4360,7070 r180 top (schematic designator C35)
C35.3 "CAPACITOR" 0603 4360,6580 r180 top (schematic designator C35)
C35.4 "CAPACITOR" 0603 4360,6090 r180 top (schematic designator C35)
C35.5 "CAPACITOR" 0603 4360,5600 r180 top (schematic designator C35)
C35.6 "CAPACITOR" 0603 4360,5070 r180 top (schematic designator C35)
C35.7 "CAPACITOR" 0603 4360,4580 r180 top (schematic designator C35)
C35.8 "CAPACITOR" 0603 4360,4090 r180 top (schematic designator C35)
C35.9 "CAPACITOR" 0603 4360,3600 r180 top (schematic designator C35)
C35.10 "CAPACITOR" 0603 4360,3110 r180 top (schematic designator C35)
C36.1 "CAPACITOR" 0603 4360,7880 r180 top (schematic designator C36)
C36.2 "CAPACITOR" 0603 4360,7390 r180 top (schematic designator C36)
C36.3 "CAPACITOR" 0603 4360,6900 r180 top (schematic designator C36)
C36.4 "CAPACITOR" 0603 4360,6410 r180 top (schematic designator C36)
C36.5 "CAPACITOR" 0603 4360,5920 r180 top (schematic designator C36)
C36.6 "CAPACITOR" 0603 4360,5390 r180 top (schematic designator C36)
C36.7 "CAPACITOR" 0603 4360,4900 r180 top (schematic designator C36)
C36.8 "CAPACITOR" 0603 4360,4410 r180 top (schematic designator C36)
C36.9 "CAPACITOR" 0603 4360,3920 r180 top (schematic designator C36)
C36.10 "CAPACITOR" 0603 4360,3430 r180 top (schematic designator C36)
C37.1 "CAPACITOR" 0603 4200,7560 r180 top (schematic designator C37)
C37.2 "CAPACITOR" 0603 4200,7070 r180 top (schematic designator C37)
C37.3 "CAPACITOR" 0603 4200,6580 r180 top (schematic designator C37)
C37.4 "CAPACITOR" 0603 4200,6090 r180 top (schematic designator C37)
C37.5 "CAPACITOR" 0603 4200,5600 r180 top (schematic designator C37)
C37.6 "CAPACITOR" 0603 4200,5070 r180 top (schematic designator C37)
C37.7 "CAPACITOR" 0603 4200,4580 r180 top (schematic designator C37)
C37.8 "CAPACITOR" 0603 4200,4090 r180 top (schematic designator C37)
C37.9 "CAPACITOR" 0603 4200,3600 r180 top (schematic designator C37)
C37.10 "CAPACITOR" 0603 4200,3110 r180 top (schematic designator C37)
C38.1 "CAPACITOR" 0603 4060,7820 r270 top (schematic designator C38)
C38.2 "CAPACITOR" 0603 4060,7330 r270 top (schematic designator C38)
C38.3 "CAPACITOR" 0603 4060,6840 r270 top (schematic designator C38)
C38.4 "CAPACITOR" 0603 4060,6350 r270 top (schematic designator C38)
C38.5 "CAPACITOR" 0603 4060,5860 r270 top (schematic designator C38)
C38.6 "CAPACITOR" 0603 4060,5330 r270 top (schematic designator C38)
C38.7 "CAPACITOR" 0603 4060,4840 r270 top (schematic designator C38)
C38.8 "CAPACITOR" 0603 4060,4350 r270 top (schematic designator C38)
C38.9 "CAPACITOR" 0603 4060,3860 r270 top (schematic designator C38)
C38.10 "CAPACITOR" 0603 4060,3370 r270 top (schematic designator C38)
C39.1 "CAPACITOR" 0603 4940,7780 r180 top (schematic designator C39)
C39.2 "CAPACITOR" 0603 4940,7290 r180 top (schematic designator C39)
C39.3 "CAPACITOR" 0603 4940,6800 r180 top (schematic designator C39)
C39.4 "CAPACITOR" 0603 4940,6310 r180 top (schematic designator C39)
C39.5 "CAPACITOR" 0603 4940,5820 r180 top (schematic designator C39)
C39.6 "CAPACITOR" 0603 4940,5290 r180 top (schematic designator C39)
C39.7 "CAPACITOR" 0603 4940,4800 r180 top (schematic designator C39)
C39.8 "CAPACITOR" 0603 4940,4310 r180 top (schematic designator C39)
C39.9 "CAPACITOR" 0603 4940,3820 r180 top (schematic designator C39)
C39.10 "CAPACITOR" 0603 4940,3330 r180 top (schematic designator C39)
C40.1 "CAPACITOR" 0603 4960,7580 r0 top (schematic designator C40)
C40.2 "CAPACITOR" 0603 4960,7090 r0 top (schematic designator C40)
C40.3 "CAPACITOR" 0603 4960,6600 r0 top (schematic designator C40)
C40.4 "CAPACITOR" 0603 4960,6110 r0 top (schematic designator C40)
C40.5 "CAPACITOR" 0603 4960,5620 r0 top (schematic designator C40)
C40.6 "CAPACITOR" 0603 4960,5090 r0 top (schematic designator C40)
C40.7 "CAPACITOR" 0603 4960,4600 r0 top (schematic designator C40)
C40.8 "CAPACITOR" 0603 4960,4110 r0 top (schematic designator C40)
C40.9 "CAPACITOR" 0603 4960,3620 r0 top (schematic designator C40)
C40.10 "CAPACITOR" 0603 4960,3130 r0 top (schematic designator C40)
C41.1 "CAPACITOR" 0603 5260,7840 r90 top (schematic designator C41)
C41.2 "CAPACITOR" 0603 5245,7360 r90 top (schematic designator C41)
C41.3 "CAPACITOR" 0603 5255,6880 r90 top (schematic designator C41)
C41.4 "CAPACITOR" 0603 5245,6395 r90 top (schematic designator C41)
C41.5 "CAPACITOR" 0603 5250,5900 r90 top (schematic designator C41)
C41.6 "CAPACITOR" 0603 5250,5375 r90 top (schematic designator C41)
C41.7 "CAPACITOR" 0603 5255,4860 r90 top (schematic designator C41)
C41.8 "CAPACITOR" 0603 5255,4385 r90 top (schematic designator C41)
C41.9 "CAPACITOR" 0603 5255,3885 r90 top (schematic designator C41)
C41.10 "CAPACITOR" 0603 5260,3390 r90 top (schematic designator C41)
C42.1 "CAPACITOR" 0603 5260,7620 r90 top (schematic designator C42)
C42.2 "CAPACITOR" 0603 5260,7130 r90 top (schematic designator C42)
C42.3 "CAPACITOR" 0603 5260,6640 r90 top (schematic designator C42)
C42.4 "CAPACITOR" 0603 5260,6150 r90 top (schematic designator C42)
C42.5 "CAPACITOR" 0603 5260,5660 r90 top (schematic designator C42)
C42.6 "CAPACITOR" 0603 5260,5130 r90 top (schematic designator C42)
C42.7 "CAPACITOR" 0603 5260,4640 r90 top (schematic designator C42)
C42.8 "CAPACITOR" 0603 5260,4150 r90 top (schematic designator C42)
C42.9 "CAPACITOR" 0603 5260,3660 r90 top (schematic designator C42)
C42.10 "CAPACITOR" 0603 5260,3170 r90 top (schematic designator C42)
C43.1 "CAPACITOR" 0603 2680,7835.69 r90 bottom (schematic designator C43)
C43.2 "CAPACITOR" 0603 2680,7345.69 r90 bottom (schematic designator C43)
C43.3 "CAPACITOR" 0603 2680,6855.69 r90 bottom (schematic designator C43)
C43.4 "CAPACITOR" 0603 2680,6365.69 r90 bottom (schematic designator C43)
C43.5 "CAPACITOR" 0603 2680,4855.69 r90 bottom (schematic designator C43)
C43.6 "CAPACITOR" 0603 2680,4365.69 r90 bottom (schematic designator C43)
C43.7 "CAPACITOR" 0603 2680,3875.69 r90 bottom (schematic designator C43)
C43.8 "CAPACITOR" 0603 2680,3385.69 r90 bottom (schematic designator C43)
C44.1 "CAPACITOR" 0603 2680,7635.69 r90 bottom (schematic designator C44)
C44.2 "CAPACITOR" 0603 2680,7145.69 r90 bottom (schematic designator C44)
C44.3 "CAPACITOR" 0603 2680,6655.69 r90 bottom (schematic designator C44)
C44.4 "CAPACITOR" 0603 2680,6165.69 r90 bottom (schematic designator C44)
C44.5 "CAPACITOR" 0603 2680,4655.69 r90 bottom (schematic designator C44)
C44.6 "CAPACITOR" 0603 2680,4165.69 r90 bottom (schematic designator C44)
C44.7 "CAPACITOR" 0603 2680,3675.69 r90 bottom (schematic designator C44)
C44.8 "CAPACITOR" 0603 2680,3185.69 r90 bottom (schematic designator C44)
C45.1 "Tantalum" 3216 3000,7860 r0 top (schematic designator C45)
C45.2 "Tantalum" 3216 3000,7370 r0 top (schematic designator C45)
C45.3 "Tantalum" 3216 3000,6880 r0 top (schematic designator C45)
C45.4 "Tantalum" 3216 3000,6390 r0 top (schematic designator C45)
C45.5 "Tantalum" 3216 3000,4880 r0 top (schematic designator C45)
C45.6 "Tantalum" 3216 3000,4390 r0 top (schematic designator C45)
C45.7 "Tantalum" 3216 3000,3900 r0 top (schematic designator C45)
C45.8 "Tantalum" 3216 3000,3410 r0 top (schematic designator C45)
C46.1 "Tantalum" 3216 2980,7580 r180 top (schematic designator C46)
C46.2 "Tantalum" 3216 2980,7090 r180 top (schematic designator C46)
C46.3 "Tantalum" 3216 2980,6600 r180 top (schematic designator C46)
C46.4 "Tantalum" 3216 2980,6110 r180 top (schematic designator C46)
C46.5 "Tantalum" 3216 2980,4600 r180 top (schematic designator C46)
C46.6 "Tantalum" 3216 2980,4110 r180 top (schematic designator C46)
C46.7 "Tantalum" 3216 2980,3620 r180 top (schematic designator C46)
C46.8 "Tantalum" 3216 2980,3130 r180 top (schematic designator C46)
C47 "CAPACITOR" 0603 6708.25,7000 r180 bottom
C48.1 "" 0805 3840,7830 r180 top (schematic designator C48)
C48.2 "" 0805 4050,7170 r180 top (schematic designator C48)
C48.3 "" 0805 3760,6810 r180 top (schematic designator C48)
C48.4 "" 0805 4050,6190 r180 top (schematic designator C48)
C48.5 "" 0805 4070,5530 r180 top (schematic designator C48)
C48.6 "" 0805 4060,5000 r180 top (schematic designator C48)
C48.7 "" 0805 3790,4800 r180 top (schematic designator C48)
C48.8 "" 0805 4040,4180 r180 top (schematic designator C48)
C48.9 "" 0805 3780,3830 r180 top (schematic designator C48)
C48.10 "" 0805 3860,3170 r180 top (schematic designator C48)
C49 "CAPACITOR" 0603 6420,4755.69 r90 bottom
C50 "CAPACITOR" 0603 6640,4755.69 r90 bottom
C51 "CAPACITOR" 0603 6420,3370 r270 bottom
C52 "CAPACITOR" 0603 6640,3370 r270 bottom
C53 "CAPACITOR" 0603 7512,5810 r0 top
C54 "Tantalum" 3216 6770,7770 r90 top
C55 "CAPACITOR" 0603 3070,5800 r270 bottom
C56 "CAPACITOR" 0603 6890,7590 r0 bottom
C57 "CAPACITOR" 0603 3050,5297.2 r270 bottom
C58 "CAPACITOR" 0603 6560,7650 r180 bottom
C59 "CAPACITOR" 0603 6560,7480 r0 bottom
C60 "Cap" CC1608-0603 6470,7320 r270 top
C61 "low ESR" PanasonicE 7910,6250 r90 top
C62 "low ESR" 3216 6890,3740 r180 top
C63 "Tantalum" 3216 6620,7260 r180 top
C64 "Tantalum" 3216 7030,7120 r180 top
C65.1 "CAPACITOR" 0805 2450,7880 r0 top (schematic designator C65)
C65.2 "CAPACITOR" 0805 2430,7380 r0 top (schematic designator C65)
C65.3 "CAPACITOR" 0805 2430,6880 r0 top (schematic designator C65)
C65.4 "CAPACITOR" 0805 2440,6400 r0 top (schematic designator C65)
C65.5 "CAPACITOR" 0805 2430,4890 r0 top (schematic designator C65)
C65.6 "CAPACITOR" 0805 2400,4390 r0 top (schematic designator C65)
C65.7 "CAPACITOR" 0805 2410,3910 r0 top (schematic designator C65)
C65.8 "CAPACITOR" 0805 2430,3430 r0 top (schematic designator C65)
C66 "CAPACITOR" 0603 7070,6940 r270 bottom
C67 "T494B476M010AS" 3528 7660,5180 r0 top
C68 "T494B476M010AS" 3528 7350,5180 r180 top
C69 "Low ESR" PanasonicE 7340,7190 r270 top
C70 "Low ESR" PanasonicE 7340,7630 r270 top
C71.1 "CAPACITOR" 0603 4635.69,7620 r0 bottom (schematic designator C71)
C71.2 "CAPACITOR" 0603 4635.69,7130 r0 bottom (schematic designator C71)
C71.3 "CAPACITOR" 0603 4635.69,6640 r0 bottom (schematic designator C71)
C71.4 "CAPACITOR" 0603 4635.69,6150 r0 bottom (schematic designator C71)
C71.5 "CAPACITOR" 0603 4635.69,5660 r0 bottom (schematic designator C71)
C71.6 "CAPACITOR" 0603 4635.69,5130 r0 bottom (schematic designator C71)
C71.7 "CAPACITOR" 0603 4635.69,4640 r0 bottom (schematic designator C71)
C71.8 "CAPACITOR" 0603 4635.69,4150 r0 bottom (schematic designator C71)
C71.9 "CAPACITOR" 0603 4635.69,3660 r0 bottom (schematic designator C71)
C71.10 "CAPACITOR" 0603 4635.69,3170 r0 bottom (schematic designator C71)
C72.1 "CAPACITOR" 0603 4680,7820 r0 bottom (schematic designator C72)
C72.2 "CAPACITOR" 0603 4680,7330 r0 bottom (schematic designator C72)
C72.3 "CAPACITOR" 0603 4680,6840 r0 bottom (schematic designator C72)
C72.4 "CAPACITOR" 0603 4680,6350 r0 bottom (schematic designator C72)
C72.5 "CAPACITOR" 0603 4680,5860 r0 bottom (schematic designator C72)
C72.6 "CAPACITOR" 0603 4680,5330 r0 bottom (schematic designator C72)
C72.7 "CAPACITOR" 0603 4680,4840 r0 bottom (schematic designator C72)
C72.8 "CAPACITOR" 0603 4680,4350 r0 bottom (schematic designator C72)
C72.9 "CAPACITOR" 0603 4680,3860 r0 bottom (schematic designator C72)
C72.10 "CAPACITOR" 0603 4680,3370 r0 bottom (schematic designator C72)
C73.1 "CAPACITOR" 0805 2450,7560 r0 top (schematic designator C73)
C73.2 "CAPACITOR" 0805 2460,7080 r0 top (schematic designator C73)
C73.3 "CAPACITOR" 0805 2460,6570 r0 top (schematic designator C73)
C73.4 "CAPACITOR" 0805 2470,6110 r0 top (schematic designator C73)
C73.5 "CAPACITOR" 0805 2450,4590 r0 top (schematic designator C73)
C73.6 "CAPACITOR" 0805 2420,4090 r0 top (schematic designator C73)
C73.7 "CAPACITOR" 0805 2420,3610 r0 top (schematic designator C73)
C73.8 "CAPACITOR" 0805 2450,3100 r0 top (schematic designator C73)
C74 "CAPACITOR" 0603 2910,5830 r90 bottom
C75 "CAPACITOR" 0603 2910,5331.75 r90 bottom
C76 "CAPACITOR" 0603 6348.25,7792 r180 bottom
C77 "CAPACITOR" 0603 6356.25,7640 r180 bottom
FID1 "FIDUCIAL" FIDUCIAL 8530,3130 r90 top
FID2 "FIDUCIAL" FIDUCIAL 8510,7800 r90 top
FID3 "FIDUCIAL" FIDUCIAL 2470,8050 r90 top
FID4 "FIDUCIAL" FIDUCIAL 8530,3128 r90 bottom
FID5 "FIDUCIAL" FIDUCIAL 8510,7800 r270 bottom
FID6 "FIDUCIAL" FIDUCIAL 2472,8050 r270 bottom
JP1 "Header 7X2" HDR2x7-2mm 8810,4500 r180 top
JP2 "Header 10X2H" HDR2X10 2120,5950 r270 top
L1 "SSF-LXH2100ID" "LUMEX DUAL RT-ANG LED" 8790,3630 r90 top
L2 "Inductor 28F0121-1SR" STEWARD_1SR 7910,7120 r180 top
L3 "Inductor 28F0121-1SR" STEWARD_1SR 7910,7650 r180 top
O1 "HFBR-1528 Fiber Transmitter" HPVL 8580,5560 r90 top
O2 "SG-636PCE 36.0000MC0" SG636PCE 8150,4120 r0 top
O3 "HFBR-2528 Fiber Receiver" HPVL 8580,5160 r90 top
POWER-A1 "39-30-3045" MJ4RTHR 8560,7480 r90 top
POWER-D1 "39-30-3045" MJ4RTHR 8560,6440 r90 top
R1 "RESISTOR" 0603 8250,5740 r90 top
R2 "RESISTOR" 0603 8250,5390 r90 top
R3 "RESISTOR" 0603 8250,5190 r0 top
R4 "RESISTOR" 0603 8250,5050 r0 top
R5 "RESISTOR" 0603 7700,3440 r0 top
R6 "RESISTOR" 0603 7930,3440 r0 top
R7 "RESISTOR" 0603 7760,4640 r0 top
R8 "RESISTOR" 0603 7740,4950 r0 top
R9 "RESISTOR" 0603 7910,4640 r180 top
R10 "" 0603 7420,4640 r180 top
R11 "" 0603 7580,4640 r180 top
R12 "" 0603 7200,4870 r90 top
R13.1 "RESISTOR" 0603 3160,7640 r90 top (schematic designator R13)
R13.2 "RESISTOR" 0603 3160,7150 r90 top (schematic designator R13)
R13.3 "RESISTOR" 0603 3160,6660 r90 top (schematic designator R13)
R13.4 "RESISTOR" 0603 3160,6170 r90 top (schematic designator R13)
R13.5 "RESISTOR" 0603 3140,5680 r90 top (schematic designator R13)
R13.6 "RESISTOR" 0603 3140,5150 r90 top (schematic designator R13)
R13.7 "RESISTOR" 0603 3160,4660 r90 top (schematic designator R13)
R13.8 "RESISTOR" 0603 3160,4170 r90 top (schematic designator R13)
R13.9 "RESISTOR" 0603 3160,3680 r90 top (schematic designator R13)
R13.10 "RESISTOR" 0603 3160,3190 r90 top (schematic designator R13)
R14.1 "RESISTOR" 0603 4360,7660 r180 top (schematic designator R14)
R14.2 "RESISTOR" 0603 4360,7170 r180 top (schematic designator R14)
R14.3 "RESISTOR" 0603 4360,6680 r180 top (schematic designator R14)
R14.4 "RESISTOR" 0603 4360,6190 r180 top (schematic designator R14)
R14.5 "RESISTOR" 0603 4360,5700 r180 top (schematic designator R14)
R14.6 "RESISTOR" 0603 4360,5170 r180 top (schematic designator R14)
R14.7 "RESISTOR" 0603 4360,4680 r180 top (schematic designator R14)
R14.8 "RESISTOR" 0603 4360,4190 r180 top (schematic designator R14)
R14.9 "RESISTOR" 0603 4360,3700 r180 top (schematic designator R14)
R14.10 "RESISTOR" 0603 4360,3210 r180 top (schematic designator R14)
R15.1 "RESISTOR" 0603 4200,7880 r180 top (schematic designator R15)
R15.2 "RESISTOR" 0603 4200,7390 r180 top (schematic designator R15)
R15.3 "RESISTOR" 0603 4200,6900 r180 top (schematic designator R15)
R15.4 "RESISTOR" 0603 4200,6410 r180 top (schematic designator R15)
R15.5 "RESISTOR" 0603 4200,5920 r180 top (schematic designator R15)
R15.6 "RESISTOR" 0603 4200,5390 r180 top (schematic designator R15)
R15.7 "RESISTOR" 0603 4200,4900 r180 top (schematic designator R15)
R15.8 "RESISTOR" 0603 4200,4410 r180 top (schematic designator R15)
R15.9 "RESISTOR" 0603 4200,3920 r180 top (schematic designator R15)
R15.10 "RESISTOR" 0603 4200,3430 r180 top (schematic designator R15)
R16.1 "RESISTOR" 0603 4060,7620 r270 top (schematic designator R16)
R16.2 "RESISTOR" 0603 4060,7070 r0 top (schematic designator R16)
R16.3 "RESISTOR" 0603 4060,6640 r270 top (schematic designator R16)
R16.4 "RESISTOR" 0603 4050,6090 r0 top (schematic designator R16)
R16.5 "RESISTOR" 0603 4060,5670 r90 top (schematic designator R16)
R16.6 "RESISTOR" 0603 4050,5140 r90 top (schematic designator R16)
R16.7 "RESISTOR" 0603 4080,4640 r270 top (schematic designator R16)
R16.8 "RESISTOR" 0603 4050,4080 r0 top (schematic designator R16)
R16.9 "RESISTOR" 0603 4060,3660 r270 top (schematic designator R16)
R16.10 "RESISTOR" 0603 4060,3170 r270 top (schematic designator R16)
R17.1 "RESISTOR" 0603 4220,7660 r0 top (schematic designator R17)
R17.2 "RESISTOR" 0603 4220,7170 r0 top (schematic designator R17)
R17.3 "RESISTOR" 0603 4220,6680 r0 top (schematic designator R17)
R17.4 "RESISTOR" 0603 4220,6190 r0 top (schematic designator R17)
R17.5 "RESISTOR" 0603 4220,5700 r0 top (schematic designator R17)
R17.6 "RESISTOR" 0603 4220,5170 r0 top (schematic designator R17)
R17.7 "RESISTOR" 0603 4220,4680 r0 top (schematic designator R17)
R17.8 "RESISTOR" 0603 4220,4190 r0 top (schematic designator R17)
R17.9 "RESISTOR" 0603 4220,3700 r0 top (schematic designator R17)
R17.10 "RESISTOR" 0603 4220,3210 r0 top (schematic designator R17)
R18.1 "RESISTOR" 0603 4200,7780 r180 top (schematic designator R18)
R18.2 "RESISTOR" 0603 4200,7290 r180 top (schematic designator R18)
R18.3 "RESISTOR" 0603 4200,6800 r180 top (schematic designator R18)
R18.4 "RESISTOR" 0603 4200,6310 r180 top (schematic designator R18)
R18.5 "RESISTOR" 0603 4200,5820 r180 top (schematic designator R18)
R18.6 "RESISTOR" 0603 4200,5290 r180 top (schematic designator R18)
R18.7 "RESISTOR" 0603 4200,4800 r180 top (schematic designator R18)
R18.8 "RESISTOR" 0603 4200,4310 r180 top (schematic designator R18)
R18.9 "RESISTOR" 0603 4200,3820 r180 top (schematic designator R18)
R18.10 "RESISTOR" 0603 4200,3330 r180 top (schematic designator R18)
R19.1 "RESISTOR" 0603 4380,7780 r0 top (schematic designator R19)
R19.2 "RESISTOR" 0603 4380,7290 r0 top (schematic designator R19)
R19.3 "RESISTOR" 0603 4380,6800 r0 top (schematic designator R19)
R19.4 "RESISTOR" 0603 4380,6310 r0 top (schematic designator R19)
R19.5 "RESISTOR" 0603 4380,5820 r0 top (schematic designator R19)
R19.6 "RESISTOR" 0603 4380,5290 r0 top (schematic designator R19)
R19.7 "RESISTOR" 0603 4380,4800 r0 top (schematic designator R19)
R19.8 "RESISTOR" 0603 4380,4310 r0 top (schematic designator R19)
R19.9 "RESISTOR" 0603 4380,3820 r0 top (schematic designator R19)
R19.10 "RESISTOR" 0603 4380,3330 r0 top (schematic designator R19)
R20.1 "RESISTOR" 0603 5120,7880 r0 top (schematic designator R20)
R20.2 "RESISTOR" 0603 5120,7390 r0 top (schematic designator R20)
R20.3 "RESISTOR" 0603 5120,6900 r0 top (schematic designator R20)
R20.4 "RESISTOR" 0603 5120,6410 r0 top (schematic designator R20)
R20.5 "RESISTOR" 0603 5120,5920 r0 top (schematic designator R20)
R20.6 "RESISTOR" 0603 5120,5390 r0 top (schematic designator R20)
R20.7 "RESISTOR" 0603 5120,4900 r0 top (schematic designator R20)
R20.8 "RESISTOR" 0603 5120,4410 r0 top (schematic designator R20)
R20.9 "RESISTOR" 0603 5120,3920 r0 top (schematic designator R20)
R20.10 "RESISTOR" 0603 5120,3430 r0 top (schematic designator R20)
R21.1 "RESISTOR" 0603 4960,7680 r0 top (schematic designator R21)
R21.2 "RESISTOR" 0603 4960,7190 r0 top (schematic designator R21)
R21.3 "RESISTOR" 0603 4960,6700 r0 top (schematic designator R21)
R21.4 "RESISTOR" 0603 4960,6210 r0 top (schematic designator R21)
R21.5 "RESISTOR" 0603 4960,5720 r0 top (schematic designator R21)
R21.6 "RESISTOR" 0603 4960,5190 r0 top (schematic designator R21)
R21.7 "RESISTOR" 0603 4960,4700 r0 top (schematic designator R21)
R21.8 "RESISTOR" 0603 4960,4210 r0 top (schematic designator R21)
R21.9 "RESISTOR" 0603 4960,3720 r0 top (schematic designator R21)
R21.10 "RESISTOR" 0603 4960,3230 r0 top (schematic designator R21)
R22.1 "RESISTOR" 0603 4960,7880 r0 top (schematic designator R22)
R22.2 "RESISTOR" 0603 4960,7390 r0 top (schematic designator R22)
R22.3 "RESISTOR" 0603 4960,6900 r0 top (schematic designator R22)
R22.4 "RESISTOR" 0603 4960,6410 r0 top (schematic designator R22)
R22.5 "RESISTOR" 0603 4960,5920 r0 top (schematic designator R22)
R22.6 "RESISTOR" 0603 4960,5390 r0 top (schematic designator R22)
R22.7 "RESISTOR" 0603 4960,4900 r0 top (schematic designator R22)
R22.8 "RESISTOR" 0603 4960,4410 r0 top (schematic designator R22)
R22.9 "RESISTOR" 0603 4960,3920 r0 top (schematic designator R22)
R22.10 "RESISTOR" 0603 4960,3430 r0 top (schematic designator R22)
R23.1 "RESISTOR" 0603 5100,7780 r180 top (schematic designator R23)
R23.2 "RESISTOR" 0603 5100,7290 r180 top (schematic designator R23)
R23.3 "RESISTOR" 0603 5100,6800 r180 top (schematic designator R23)
R23.4 "RESISTOR" 0603 5100,6310 r180 top (schematic designator R23)
R23.5 "RESISTOR" 0603 5100,5820 r180 top (schematic designator R23)
R23.6 "RESISTOR" 0603 5100,5290 r180 top (schematic designator R23)
R23.7 "RESISTOR" 0603 5100,4800 r180 top (schematic designator R23)
R23.8 "RESISTOR" 0603 5100,4310 r180 top (schematic designator R23)
R23.9 "RESISTOR" 0603 5100,3820 r180 top (schematic designator R23)
R23.10 "RESISTOR" 0603 5100,3330 r180 top (schematic designator R23)
R24.1 "RESISTOR" 0603 5120,7680 r0 top (schematic designator R24)
R24.2 "RESISTOR" 0603 5120,7190 r0 top (schematic designator R24)
R24.3 "RESISTOR" 0603 5120,6700 r0 top (schematic designator R24)
R24.4 "RESISTOR" 0603 5120,6210 r0 top (schematic designator R24)
R24.5 "RESISTOR" 0603 5120,5720 r0 top (schematic designator R24)
R24.6 "RESISTOR" 0603 5120,5190 r0 top (schematic designator R24)
R24.7 "RESISTOR" 0603 5120,4700 r0 top (schematic designator R24)
R24.8 "RESISTOR" 0603 5120,4210 r0 top (schematic designator R24)
R24.9 "RESISTOR" 0603 5120,3720 r0 top (schematic designator R24)
R24.10 "RESISTOR" 0603 5120,3230 r0 top (schematic designator R24)
R25.1 "RESISTOR" 0603 5120,7580 r0 top (schematic designator R25)
R25.2 "RESISTOR" 0603 5120,7090 r0 top (schematic designator R25)
R25.3 "RESISTOR" 0603 5120,6600 r0 top (schematic designator R25)
R25.4 "RESISTOR" 0603 5120,6110 r0 top (schematic designator R25)
R25.5 "RESISTOR" 0603 5120,5620 r0 top (schematic designator R25)
R25.6 "RESISTOR" 0603 5120,5090 r0 top (schematic designator R25)
R25.7 "RESISTOR" 0603 5120,4600 r0 top (schematic designator R25)
R25.8 "RESISTOR" 0603 5120,4110 r0 top (schematic designator R25)
R25.9 "RESISTOR" 0603 5120,3620 r0 top (schematic designator R25)
R25.10 "RESISTOR" 0603 5120,3130 r0 top (schematic designator R25)
R26.1 "" 0603 2440,7720 r270 top (schematic designator R26)
R26.2 "" 0603 2440,7230 r270 top (schematic designator R26)
R26.3 "" 0603 2440,6740 r270 top (schematic designator R26)
R26.4 "" 0603 2440,6250 r270 top (schematic designator R26)
R26.5 "" 0603 2440,4740 r270 top (schematic designator R26)
R26.6 "" 0603 2440,4250 r270 top (schematic designator R26)
R26.7 "" 0603 2440,3760 r270 top (schematic designator R26)
R26.8 "" 0603 2440,3270 r270 top (schematic designator R26)
R27 "LPF resistor" 0603 6770,7380 r90 top
R28 "0.1% 25 ppm/C" 0603 6770,7550 r90 top
R29 "0.1% 25 ppm/C" 0603 6570,7800 r0 top
R30.1 "RESISTOR" 0603 5420,7740 r0 top (schematic designator R30)
R30.2 "RESISTOR" 0603 5420,7250 r0 top (schematic designator R30)
R30.3 "RESISTOR" 0603 5420,6760 r0 top (schematic designator R30)
R30.4 "RESISTOR" 0603 5420,6270 r0 top (schematic designator R30)
R30.5 "RESISTOR" 0603 5420,5780 r0 top (schematic designator R30)
R30.6 "RESISTOR" 0603 5420,5250 r0 top (schematic designator R30)
R30.7 "RESISTOR" 0603 5420,4760 r0 top (schematic designator R30)
R30.8 "RESISTOR" 0603 5420,4270 r0 top (schematic designator R30)
R30.9 "RESISTOR" 0603 5420,3780 r0 top (schematic designator R30)
R30.10 "RESISTOR" 0603 5420,3290 r0 top (schematic designator R30)
R31 "RESISTOR" 0603 5840,3520 r270 top
R32 "RESISTOR" 0603 5840,4010 r270 top
R33 "RESISTOR" 0603 5840,4500 r270 top
R34 "RESISTOR" 0603 5840,4950 r270 top
R35 "RESISTOR" 0603 6420,4910 r90 top
R36 "RESISTOR" 0603 5840,6010 r270 top
R37 "RESISTOR" 0603 5840,6490 r270 top
R38 "RESISTOR" 0603 6220,4740 r270 top
R39 "RESISTOR" 0603 6390,3250 r180 top
R40 "RESISTOR" 0603 6410,4300 r0 top
R41 "RESISTOR" 0603 6210,4480 r0 top
R42 "RESISTOR" 0603 6290,3450 r0 top
R43 "RESISTOR" 0603 5840,6980 r270 top
R44 "RESISTOR" 0603 5850,7470 r270 top
R45 "RESISTOR" 0603 5780,5390 r270 top
R46 "RESISTOR" 0603 5850,7840 r270 top
R47 "RESISTOR" 0603 6890,7120 r90 top
R48 "RESISTOR" 0603 6800,7130 r270 top
R49.1 "" 0603 2590,7890 r0 top (schematic designator R49)
R49.2 "" 0603 2590,7400 r0 top (schematic designator R49)
R49.3 "" 0603 2580,6910 r0 top (schematic designator R49)
R49.4 "" 0603 2590,6420 r0 top (schematic designator R49)
R49.5 "" 0603 2580,4920 r0 top (schematic designator R49)
R49.6 "" 0603 2560,4410 r0 top (schematic designator R49)
R49.7 "" 0603 2570,3920 r0 top (schematic designator R49)
R49.8 "" 0603 2580,3440 r0 top (schematic designator R49)
R50.1 "" 0603 2600,7550 r180 top (schematic designator R50)
R50.2 "" 0603 2600,7080 r180 top (schematic designator R50)
R50.3 "" 0603 2600,6570 r180 top (schematic designator R50)
R50.4 "" 0603 2580,6050 r90 top (schematic designator R50)
R50.5 "" 0603 2580,4590 r180 top (schematic designator R50)
R50.6 "" 0603 2570,4090 r180 top (schematic designator R50)
R50.7 "" 0603 2560,3610 r180 top (schematic designator R50)